# Altium PCB PCB KONACNO.PcbDoc (part 1 of 3)
Units mil, origin at the board's own origin, x right, y up, seen from the top; angles counter-clockwise.
Board outline 9378.94 x 3727.36 mil, 6 copper layers (Top Layer, Signal Layer 1, Signal Layer 2, Signal Layer 3, Signal Layer 4, Bottom Layer), stack 58.8 mil thick; 270 components, 238 nets, 1180 pads, 202 vias.
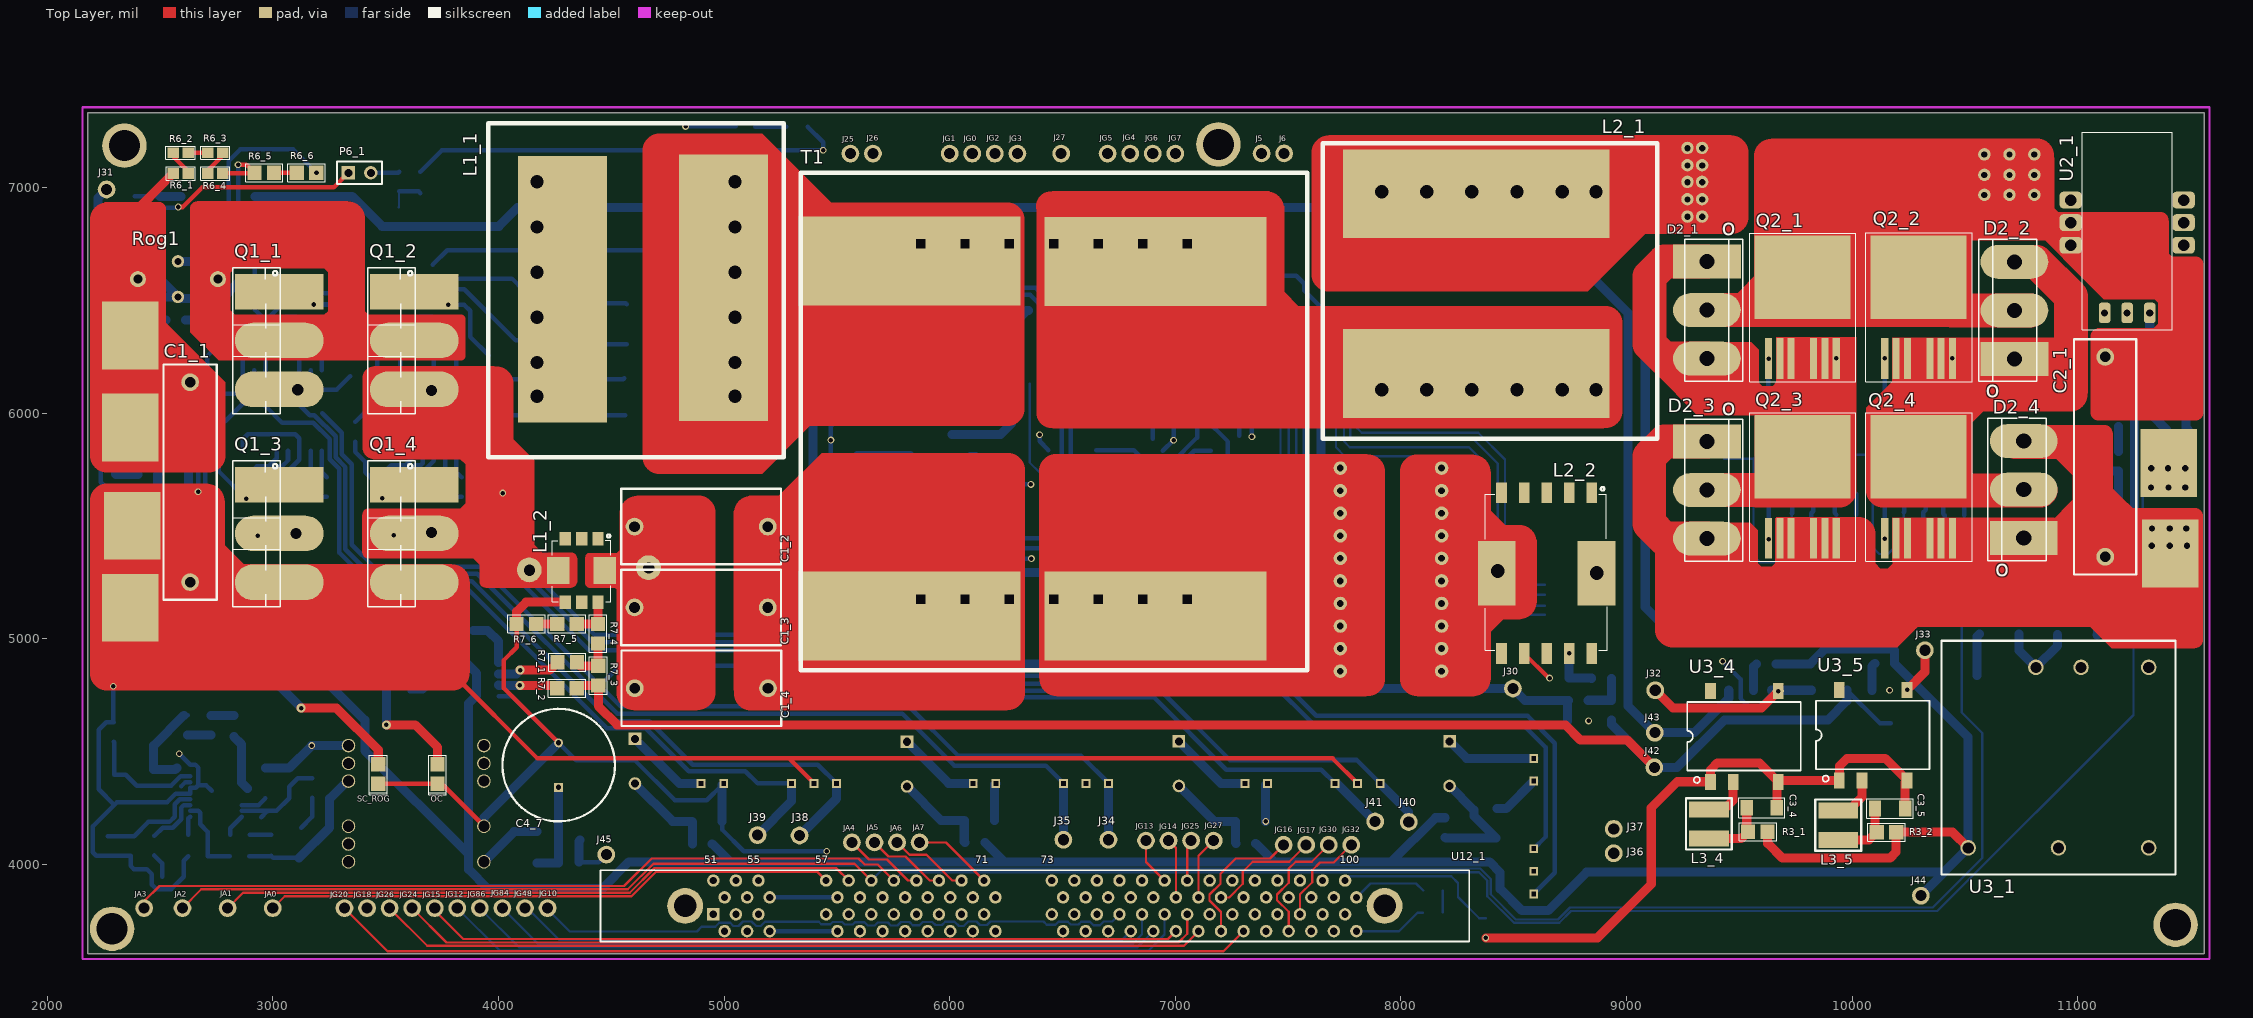
[diagram p0: Top Layer view]
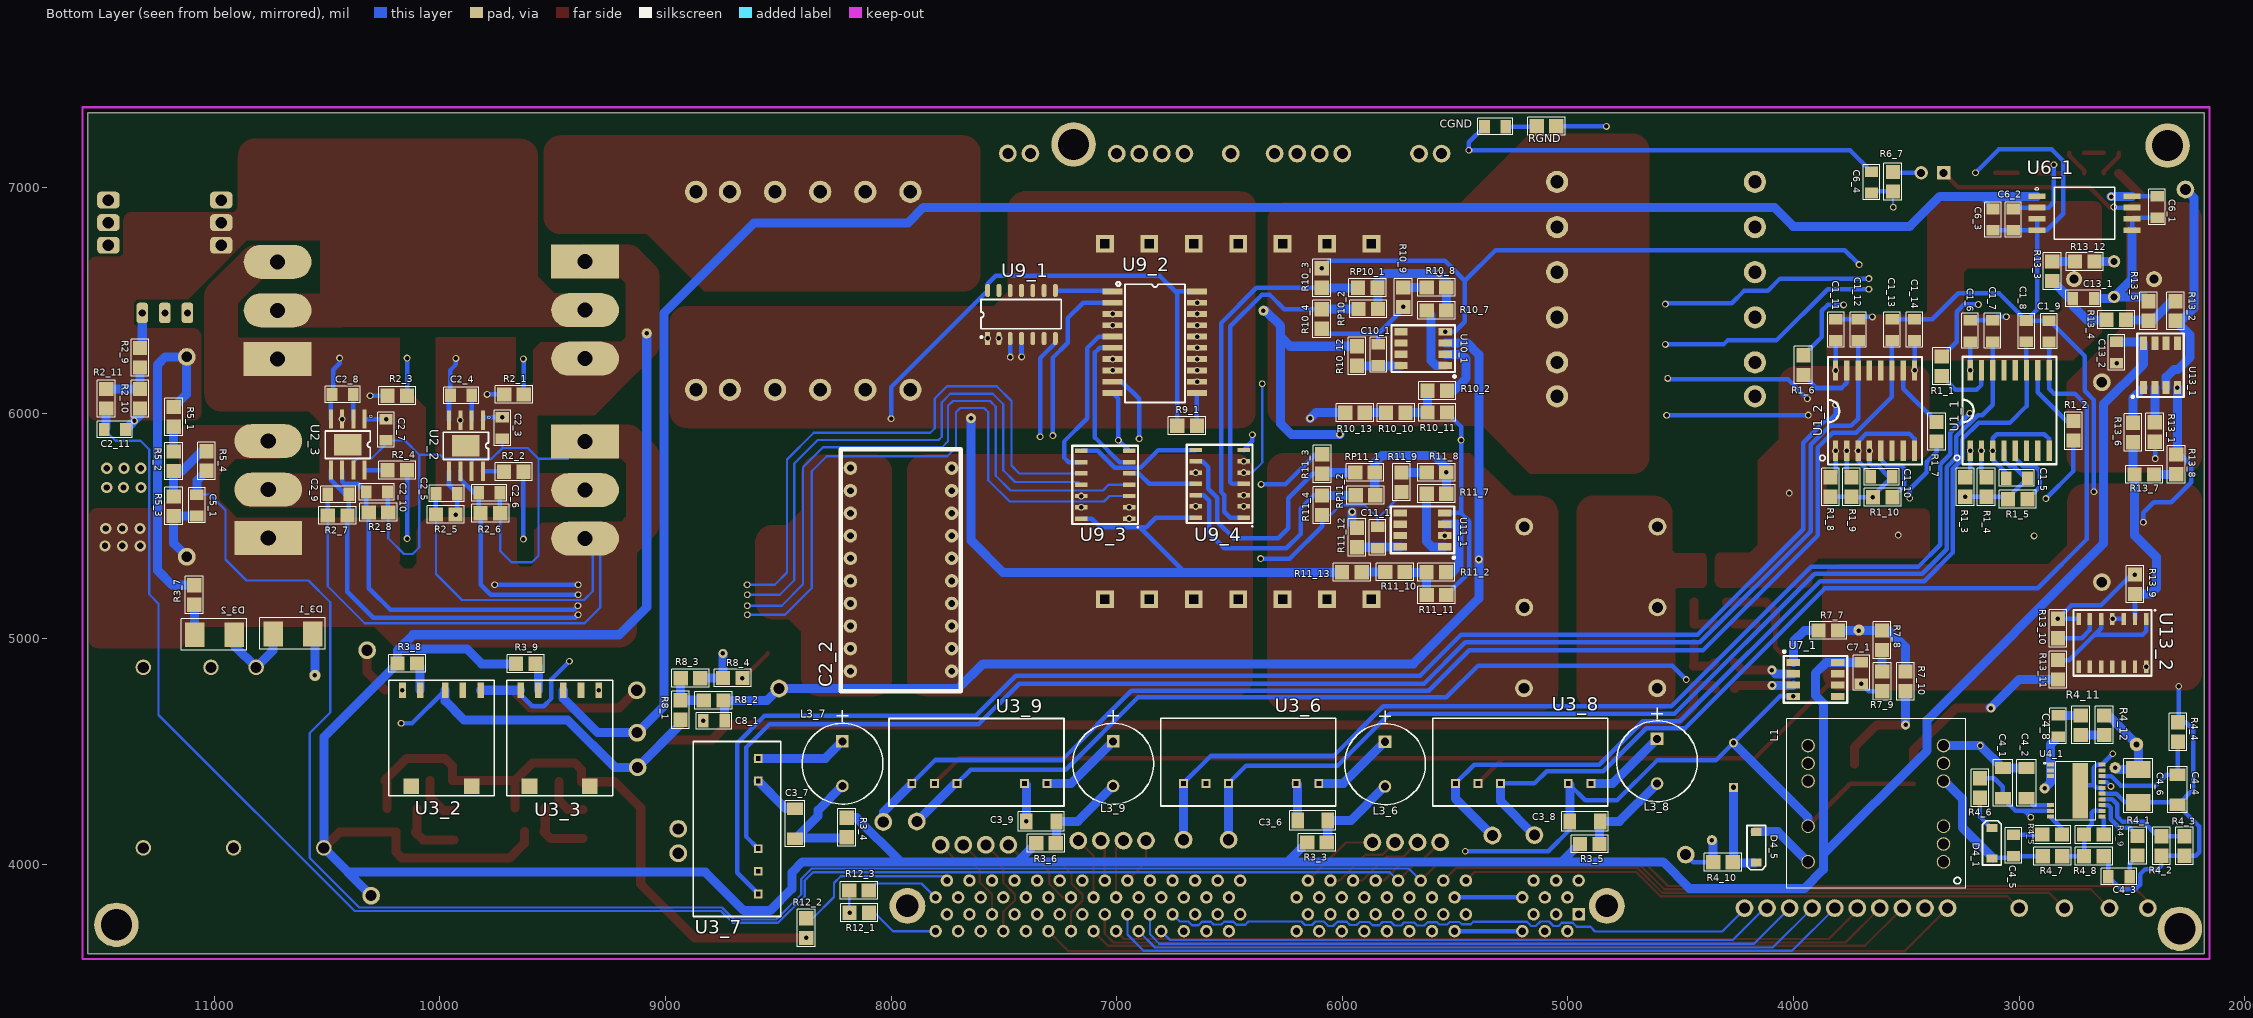
[diagram p1: Bottom Layer view, seen from below]
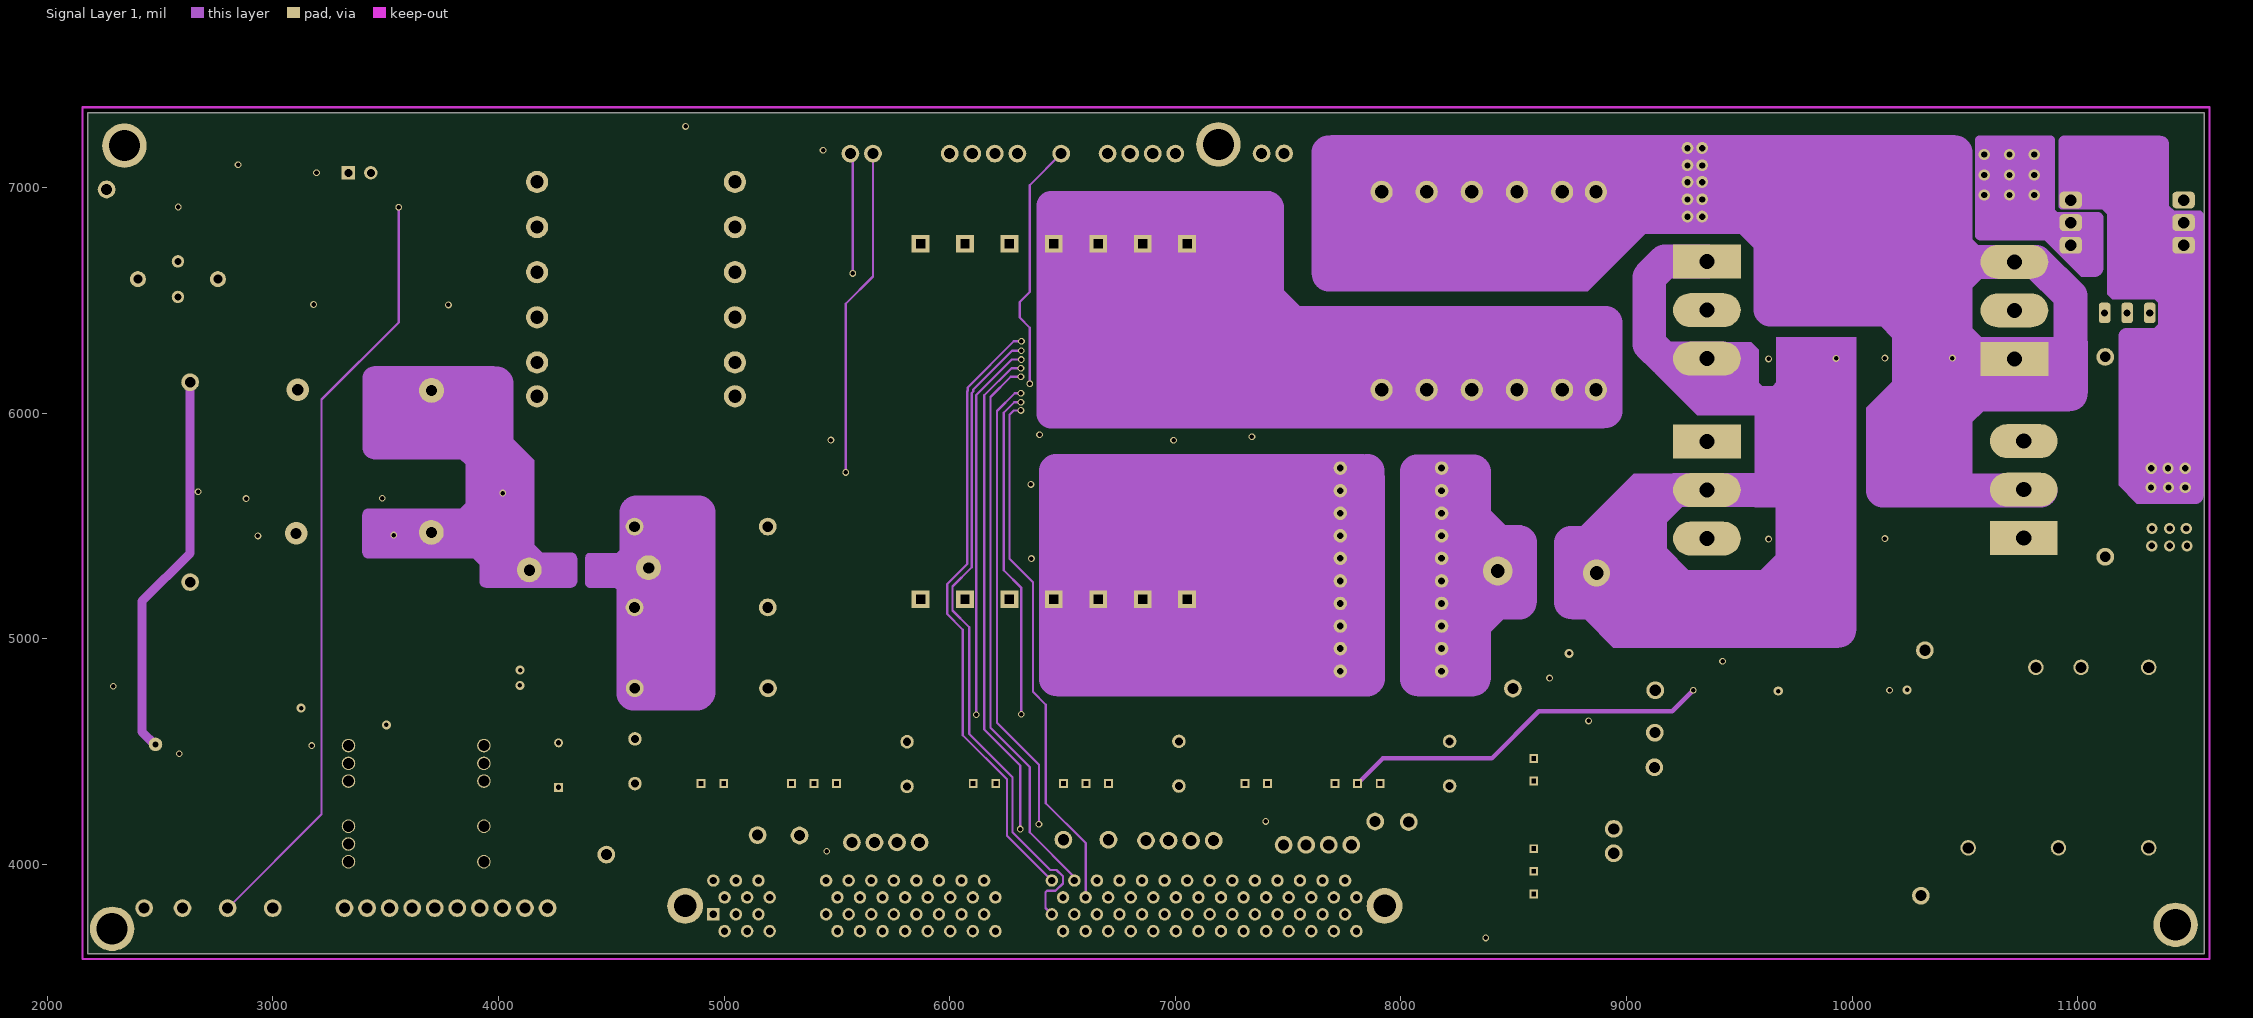
[diagram p2: Signal Layer 1]
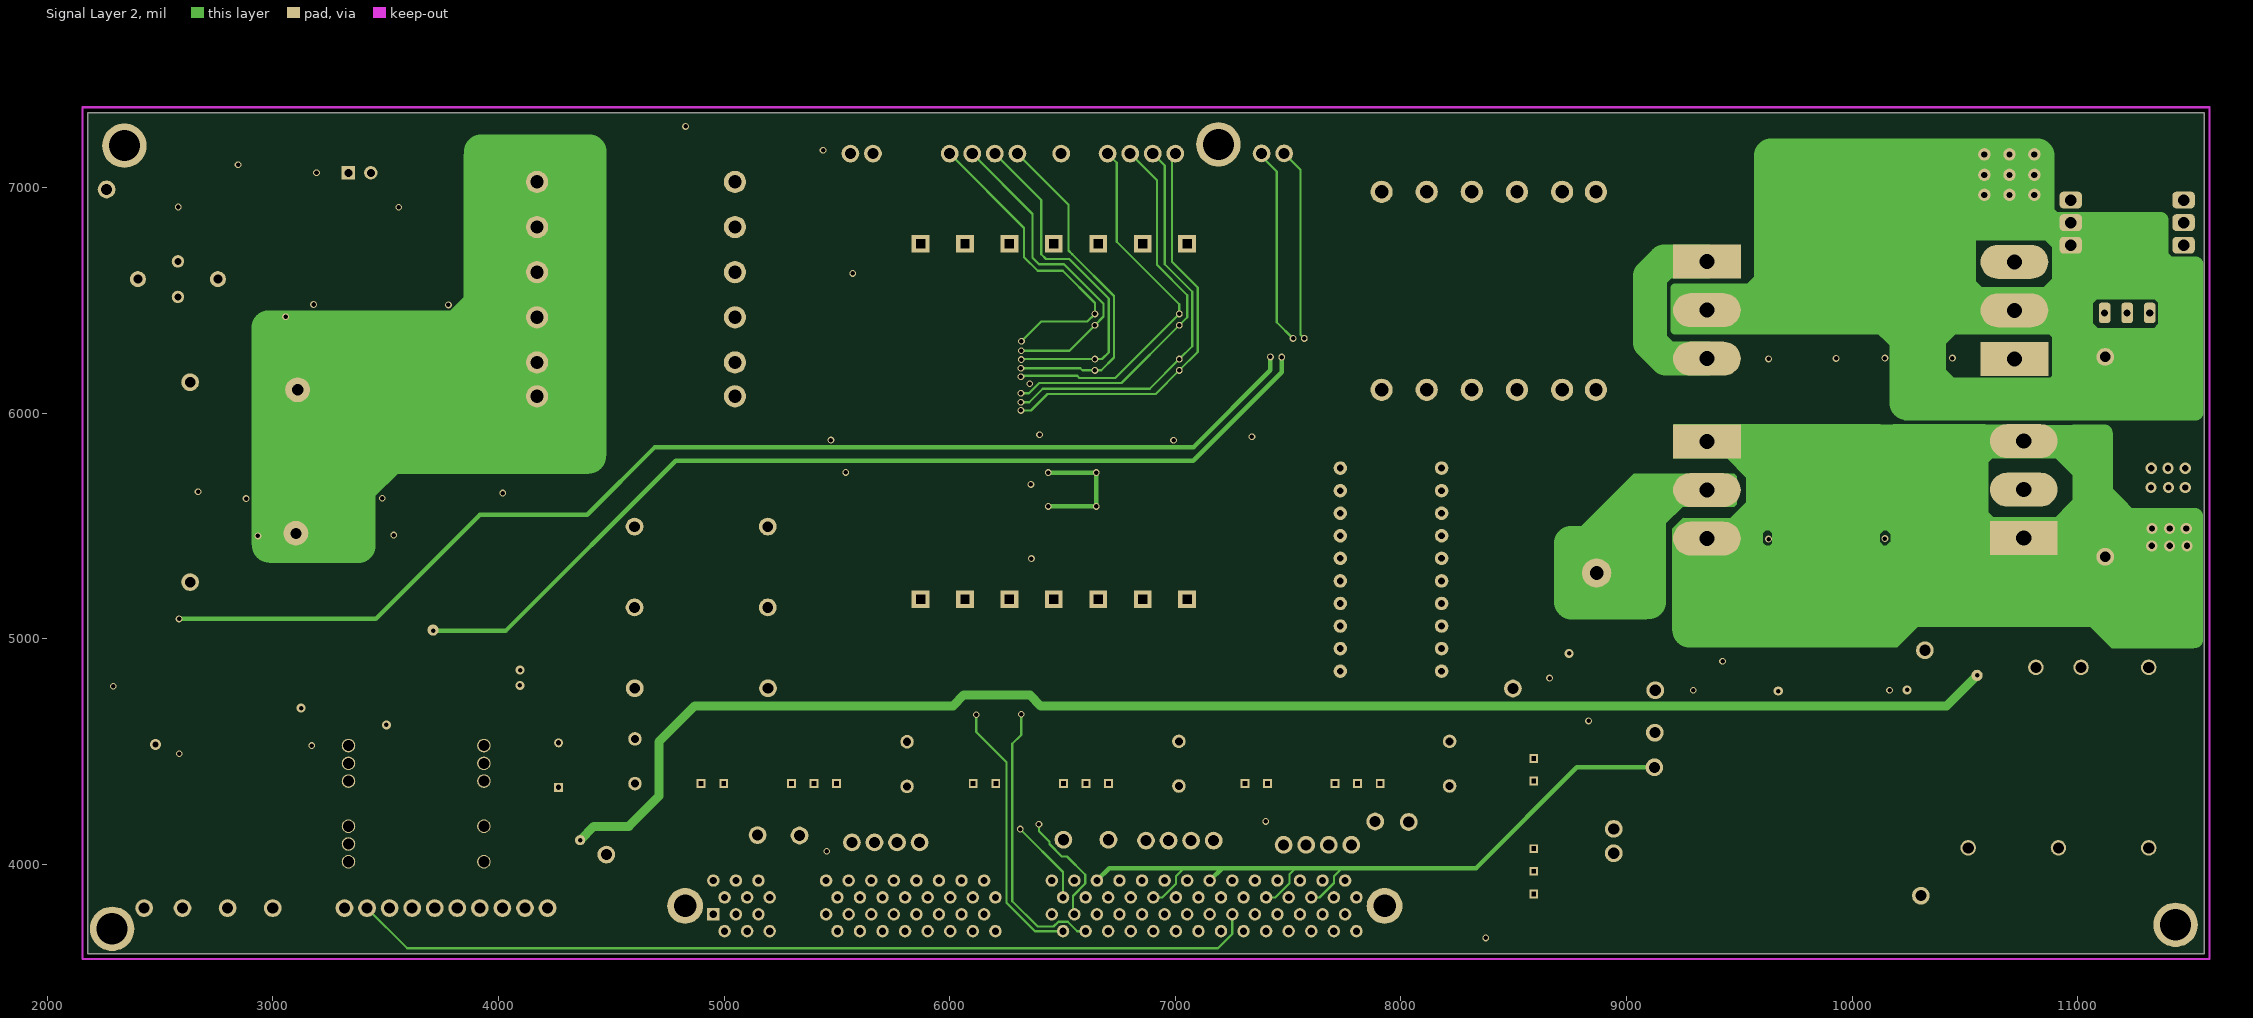
[diagram p3: Signal Layer 2]
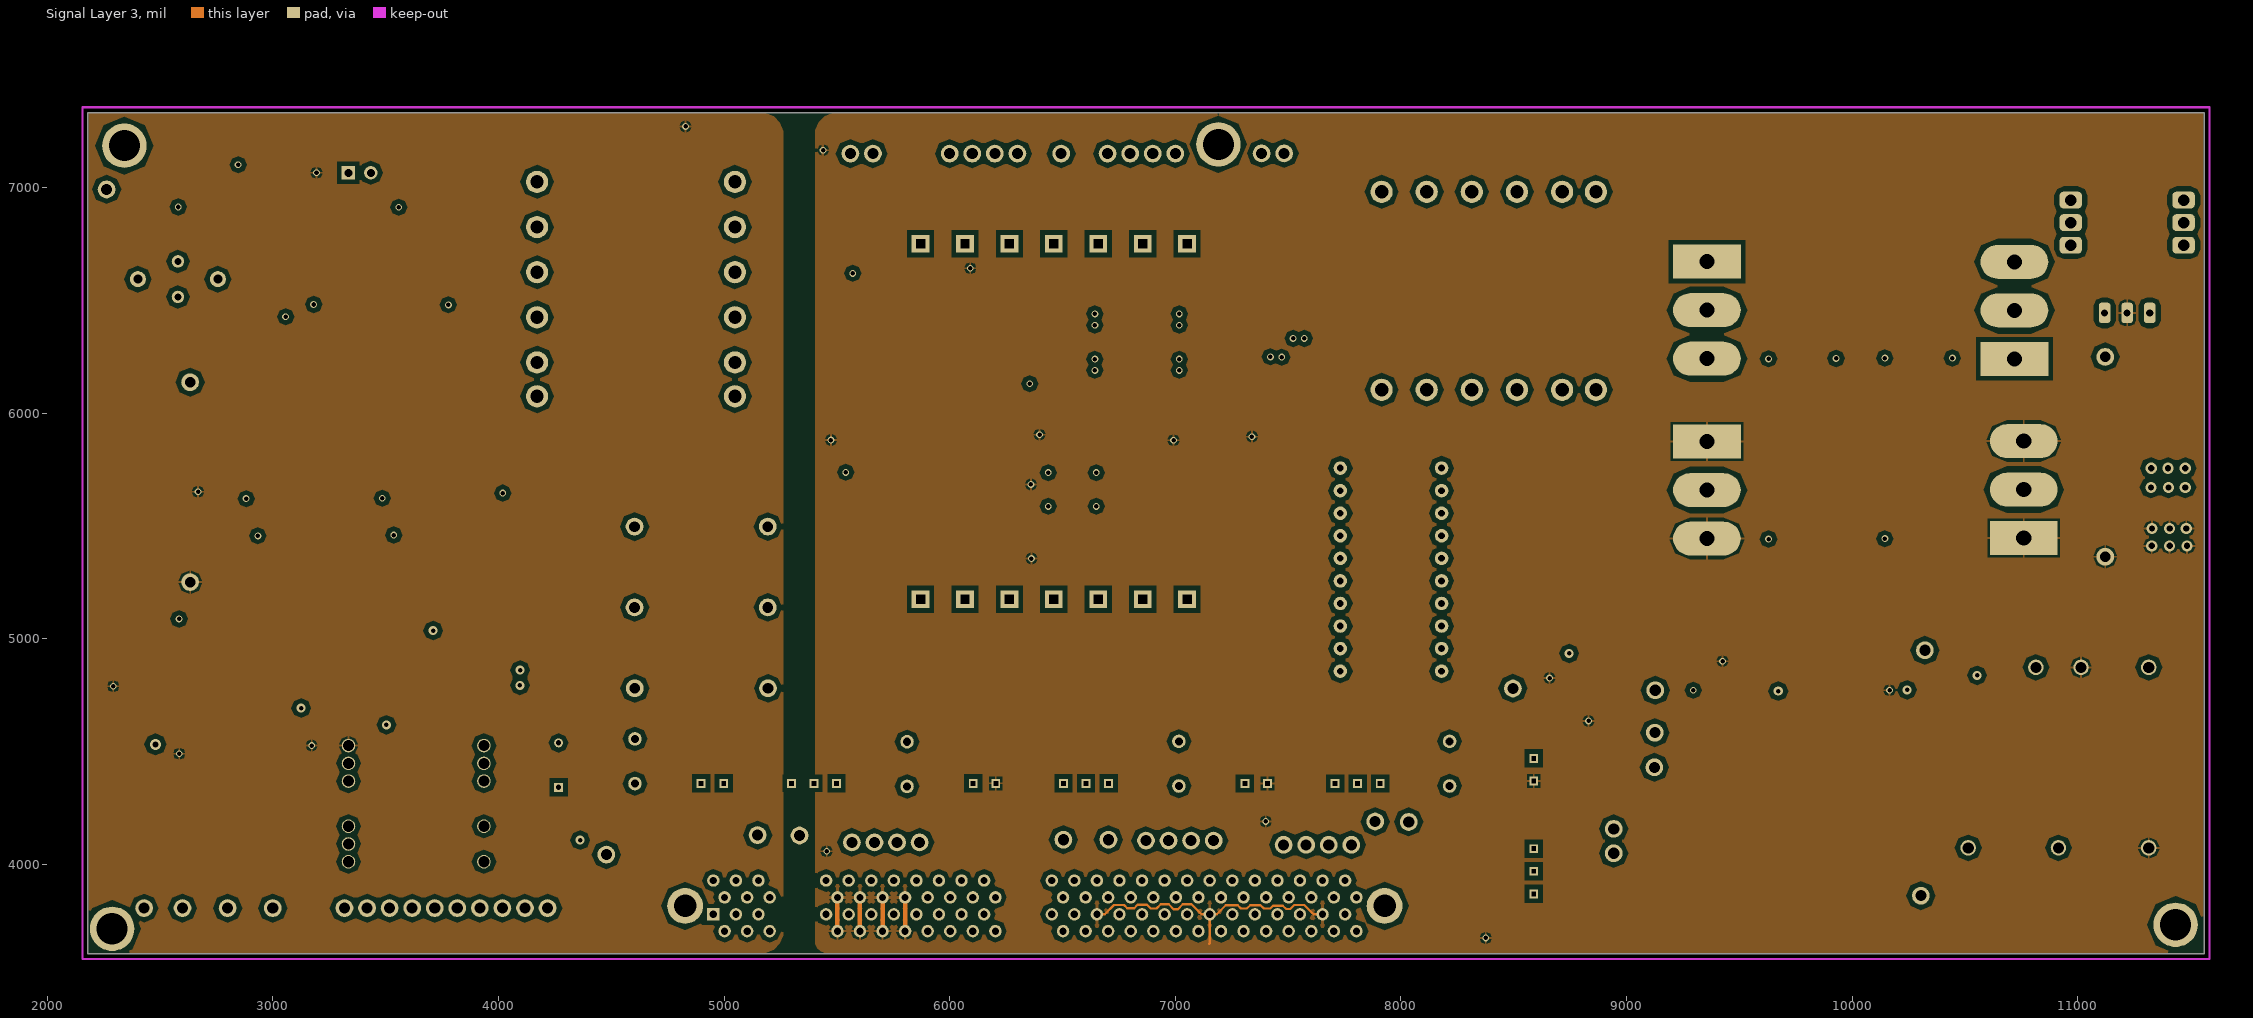
[diagram p4: Signal Layer 3]
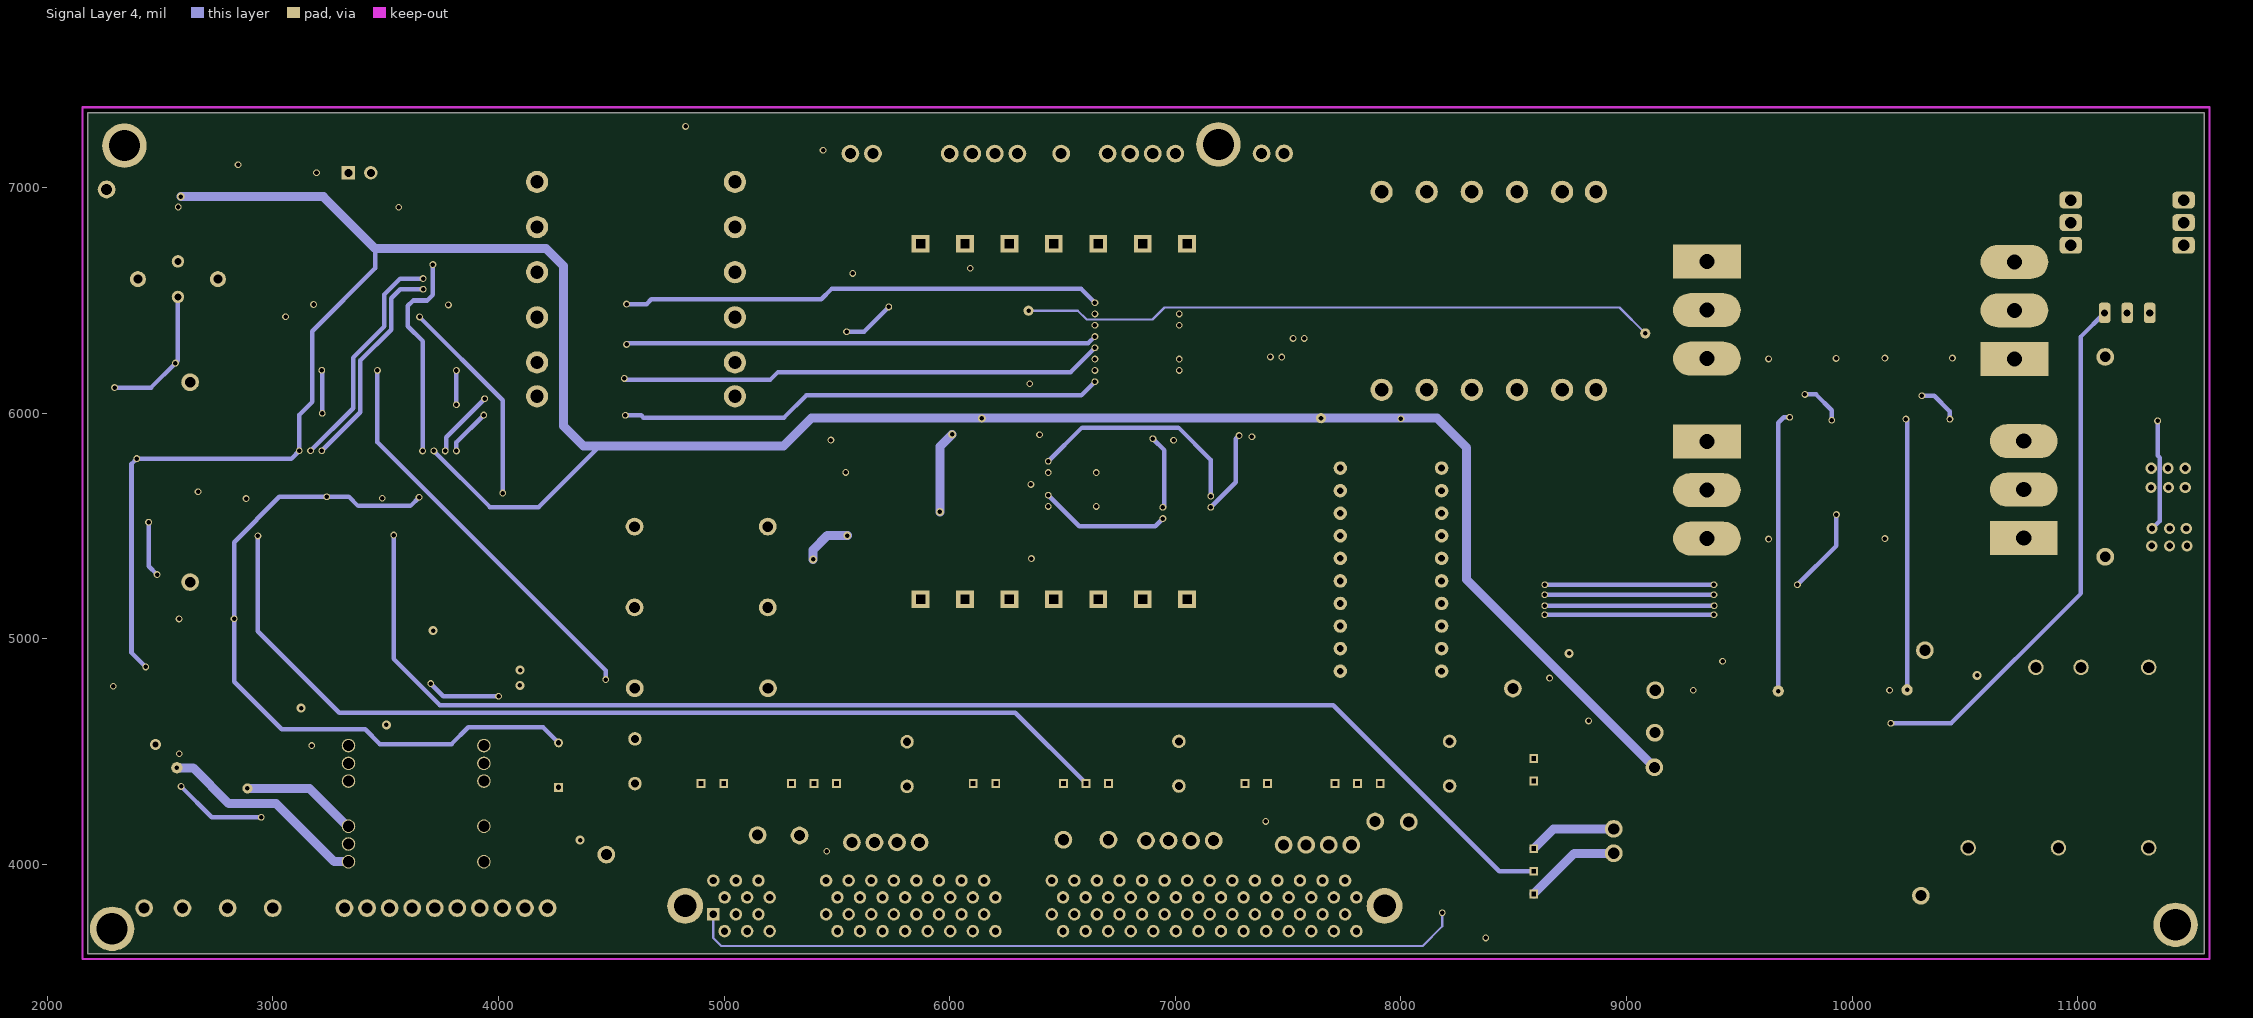
[diagram p5: Signal Layer 4]

## Layer stack, top to bottom
Top Solder: solder mask 0.4, Solder Resist, Dk 3.5
Top Layer: signal copper 1.4
Dielectric 1: core 10, FR-4, Dk 4.2
Signal Layer 1: signal copper 4
Dielectric 3: prepreg 5, Dk 4.2
Signal Layer 2: signal copper 4
Dielectric 4: core 10, Dk 4.2
Signal Layer 3: signal copper 4
Dielectric6: prepreg 5, FR-4, Dk 4.2
Signal Layer 4: signal copper 4
Dielectric 5: core 10, Dk 4.2
Bottom Layer: signal copper 1.4
Bottom Solder: solder mask 0.4, Solder Resist, Dk 3.5

## Board outline
2181.1,3604.33 11560.04,3604.33 11560.04,7331.69 2181.1,7331.69

## Design rules (kind name [scope] priority, off if disabled: settings)
Clearance Clearance_15 [OnLayer('Top Layer') vs OnLayer('Top Layer')] p1: gap=3 except(0: Arc-Text Track-Text SMDPad-Text THPad-Text Via-Text Fill-Text Poly-Text Region-Text Text-Text; 10: Track-THPad Track-Via)
Clearance Clearance_16 [OnLayer('Bottom Layer') vs OnLayer('Bottom Layer')] p2: gap=3 except(0: Arc-Text Track-Text SMDPad-Text THPad-Text Via-Text Fill-Text Poly-Text Region-Text Text-Text; 10: Track-THPad Track-Via)
Clearance Clearance_14 [InNamedPolygon('GNDLV')] p3: gap=20 except(0: Arc-Text Track-Text SMDPad-Text THPad-Text Via-Text Fill-Text Poly-Text Region-Text Text-Text)
Clearance Clearance_13 [InNamedPolygon('GNDHV')] p4: gap=20 except(0: Arc-Text Track-Text SMDPad-Text THPad-Text Via-Text Fill-Text Poly-Text Region-Text Text-Text)
Clearance Clearance_12 [InNamedPolygon('GNDHV')] p5: gap=20 except(0: Arc-Text Track-Text SMDPad-Text THPad-Text Via-Text Fill-Text Poly-Text Region-Text Text-Text)
Clearance Clearance_8 [InNamedPolygon('GNDLV')] p6: gap=20 except(0: Arc-Text Track-Text SMDPad-Text THPad-Text Via-Text Fill-Text Poly-Text Region-Text Text-Text)
Clearance Clearance_7 [InNamedPolygon('GNDLV')] p7: gap=10 except(0: Arc-Text Track-Text SMDPad-Text THPad-Text Via-Text Fill-Text Poly-Text Region-Text Text-Text)
Clearance Clearance_6 [InNamedPolygon('GNDHV')] p8: gap=10 except(0: Arc-Text Track-Text SMDPad-Text THPad-Text Via-Text Fill-Text Poly-Text Region-Text Text-Text)
Clearance Clearance_5 [OnLayer('Signal Layer 1') vs OnLayer('Signal Layer 1')] p9: gap=10 except(0: Arc-Text Track-Text SMDPad-Text THPad-Text Via-Text Fill-Text Poly-Text Region-Text Text-Text)
Clearance Clearance_11 [OnLayer('Signal Layer 4') vs OnLayer('Signal Layer 4')] p10: gap=10 except(0: Arc-Text Track-Text SMDPad-Text THPad-Text Via-Text Fill-Text Poly-Text Region-Text Text-Text)
Clearance Clearance_10 [OnLayer('Signal Layer 3') vs OnLayer('Signal Layer 3')] p11: gap=10 except(0: Arc-Text Track-Text SMDPad-Text THPad-Text Via-Text Fill-Text Poly-Text Region-Text Text-Text)
Clearance Clearance_9 [OnLayer('Signal Layer 2') vs OnLayer('Signal Layer 2')] p12: gap=10 except(0: Arc-Text Track-Text SMDPad-Text THPad-Text Via-Text Fill-Text Poly-Text Region-Text Text-Text)
Clearance Clearance_4 [InNamedPolygon('GNDLV')] p13: gap=20
Clearance Clearance_3 [InNamedPolygon('GNDLV')] p14: gap=20
Clearance Clearance_2 [InNamedPolygon('GND_LV_L04_P008')] p15: gap=20
Clearance Clearance_1 [InNamedPolygon('GNDHV')] p16: gap=20
Clearance [All] p17: gap=0
HoleSize [IsVia] p1: absolutevalues=TRUE maxlimit=196.85 minlimit=20 maxpercent=80.000 minpercent=20.000
HoleToHoleClearance [All] p1: gap=0 allowstackedmicrovias=TRUE
MinimumSolderMaskSliver [All] p1: minsoldermaskwidth=0
PolygonConnect [All] p1: connectstyle=Relief reliefconductorwidth=10 reliefentries=4 polygonreliefangle="90 Angle" airgapwidth=10
RoutingVias [All] p1: holewidth=28 width=50 viastyle="Through Hole" minholewidth=1 minwidth=2 maxholewidth=150 maxwidth=200
SilkToSilkClearance [All] p1: silktosilkclearance=0
SilkToSolderMaskClearance [IsPad] p1: minsilkscreentomaskgap=0 clearancetoexposedcopper=TRUE
SolderMaskExpansion [All] p1: expansion=4
Width [All] p1: maxlimit=200 minlimit=10 preferedwidth=130
25 further rules are at their usual default settings.

## Components (designator, comment, footprint, x,y, rotation, side; value= is the part's Value field where it differs from the comment)
C1_1 "0.47uF" B32673P 2633.86,6136.81 r270 top
C1_2 "3.3nF" B32652 4603.35,5497.05 r0 top
C1_3 "3.3nF" B32652 4603.35,5138.78 r0 top
C1_4 "3.3nF" B32652 4604.33,4780.51 r0 top
C1_5 "3.3nF" C0805 2969.49,5711.61 r0 bottom
C1_6 "1uF" C0805 3217.52,6405.51 r270 bottom
C1_7 "1uF" C0805 3118.11,6322.83 r90 bottom
C1_8 "1uF" C0805 2968.5,6404.53 r270 bottom
C1_9 "1uF" C0805 2868.11,6320.87 r90 bottom
C1_10 "3.3nF" C0805 3568.9,5717.52 r0 bottom
C1_11 "1uF" C0805 3812.99,6410.43 r270 bottom
C1_12 "1uF" C0805 3713.58,6327.76 r90 bottom
C1_13 "1uF" C0805 3562.99,6410.43 r270 bottom
C1_14 "1uF" C0805 3464.57,6327.76 r90 bottom
C2_1 "4.7uF" B32523 11121.06,6249.02 r270 top
C2_2 "10nF" "AVX  1A 105K AN 360" 7731.3,4856.3 r90 bottom
C2_3 "1uF" C0805 9722.44,5892.72 r90 bottom
C2_4 "0.1uF" C0805 9946.85,6078.74 r180 bottom
C2_5 "3.3nF" C0805 10010.83,5642.72 r180 bottom
C2_6 "3.3nF" C0805 9739.17,5646.65 r0 bottom
C2_7 "1uF" C0805 10238.19,5884.84 r90 bottom
C2_8 "0.1uF" C0805 10471.46,6082.68 r180 bottom
C2_9 "3.3nF" C0805 10491.14,5639.76 r180 bottom
C2_10 "3.3nF" C0805 10237.2,5650.59 r0 bottom
C2_11 "0.1uF" C0805 11398.62,5927.17 r0 bottom
C3_4 "2.2uF" C1206 32071.85,-3056.1 r0 top
C3_5 "2.2uF" C1206 32640.16,-3060 r0 top
C3_6 "4.7uF" C1206 -16340.94,-3112.83 r180 bottom
C3_7 "4.7uF" C1206 15732.28,-18292.72 r270 bottom
C3_8 "4.7uF" C1206 -17548.23,-3116.14 r180 bottom
C3_9 "4.7uF" C1206 -15138.74,-3116.5 r180 bottom
C4_1 "10uF" C1206 -4234.25,26832.68 r90 bottom
C4_2 "10uF" C1206 -4339.57,26832.68 r90 bottom
C4_3 "22nF" C0805 2599.41,3945.87 r180 bottom
C4_4 "0.33uF" C1206 9605.31,-18142.13 r270 bottom
C4_5 "47pF" C0805 3025.59,4125 r270 bottom
C4_6 "0.1uF" C1210 2472.44,4274.61 r90 bottom
C4_7 "UPW2A151MHD" UPW2A151MHD 4266.73,4341.54 r90 top
C4_8 "47pF" C0805 2827.76,4571.85 r90 bottom
C5_1 "0.1uF" C0805 11076.77,5550.2 r90 bottom
C6_1 "0.1uF" C0805 2388.78,6872.05 r90 bottom
C6_2 "100pF" C0805 3026.57,6815.94 r90 bottom
C6_3 "0.1uF" C0805 3116.14,6815.94 r90 bottom
C6_4 "0.1uF" C0805 3654.53,7063.98 r270 bottom
C7_1 "0.1uF" C0805 3699.8,4807.09 r90 bottom
C8_1 "1nF" C0805 8743.11,4635.83 r0 bottom
C10_1 "0.1uF" C0805 5840.55,6299.21 r270 bottom
C11_1 "0.1uF" C0805 5843.5,5490.16 r270 bottom
C13_1 "3.3nF" C0805 2756.89,6507.87 r180 bottom
C13_2 "0.1uF" C0805 2568.9,6227.36 r90 bottom
CGND "?" C0805 5364.17,7269.69 r180 bottom
D2_1 "100V" TO-247AC 9356.3,6671.26 r0 top
D2_2 "100V" TO-247AC 10718.5,6240.16 r180 top
D2_3 "100V" TO-247AC 9356.3,5874.02 r0 top
D2_4 "100V" TO-247AC 10759.84,5445.87 r180 top
D4_1 "CMMR1U-04" "SOD-123F Central S" 3121.06,4093.5 r90 bottom
D4_5 "CMMR1U-08" "SOD-123F Central S" 4165.35,4075.79 r270 bottom
J5 "Male single header" Male_single_pin#1 7382.36,7150.98 r0 top
J6 "Male single header" Male_single_pin#1 7482.36,7150.98 r0 top
J25 "Male single header" Male_single_pin#2 5567.91,7150 r0 top
J26 "Male single header" Male_single_pin#3 5665.35,7150 r0 top
J27 "Male single header" Male_single_pin#1 6494.09,7150 r0 top
J30 "Male single header" Male_single_pin#1 8496.06,4779.53 r0 top
J31 "Male single header" Male_single_pin#1 2263.78,6991.14 r0 top
J32 "Male single header" Male_single_pin#1 9126.97,4771.65 r0 top
J33 "Male single header" Male_single_pin#1 10321.85,4948.82 r0 top
J34 "Male single header" Male_single_pin#1 6703.74,4109.25 r0 top
J35 "Male single header" Male_single_pin#1 6503.94,4109.25 r0 top
J36 "Male single header" Male_single_pin#1 8942.91,4049.21 r0 top
J37 "Male single header" Male_single_pin#1 8942.91,4157.48 r0 top
J38 "Male single header" Male_single_pin#1 5334.65,4127.95 r0 top
J39 "Male single header" Male_single_pin#1 5148.62,4129.92 r0 top
J40 "Male single header" Male_single_pin#1 8034.45,4187.99 r0 top
J41 "Male single header" Male_single_pin#1 7885.83,4189.96 r0 top
J42 "Male single header" Male_single_pin#1 9123.03,4430.12 r0 top
J43 "Male single header" Male_single_pin#1 9125,4583.66 r0 top
J44 "Male single header" Male_single_pin#1 10304.13,3861.22 r0 top
J45 "Male single header" Male_single_pin#1 4478.35,4043.31 r0 top
JA0 "Male single header" Male_single_pin#4 2689.96,3806.1 r0 top
JA1 "Male single header" Male_single_pin#5 2858.27,3806.1 r0 top
JA2 "Male single header" Male_single_pin#6 3181.1,3806.1 r0 top
JA3 "Male single header" Male_single_pin#7 2400,3806.1 r0 top
JA4 "Male single header" Male_single_pin#8 5561.02,4097.44 r180 top
JA5 "Male single header" Male_single_pin#9 5673.23,4097.44 r180 top
JA6 "Male single header" Male_single_pin#10 5774.61,4097.44 r180 top
JA7 "Male single header" Male_single_pin#11 5868.11,4097.44 r180 top
JG0 "Male single header" Male_single_pin#12 6117.13,7150.59 r0 top
JG1 "Male single header" Male_single_pin#13 6048.23,7149.61 r0 top
JG2 "Male single header" Male_single_pin#14 6576.77,7588.58 r0 top
JG3 "Male single header" Male_single_pin#15 6976.77,7939.21 r0 top
JG4 "Male single header" Male_single_pin#16 6965.55,7398.62 r0 top
JG5 "Male single header" Male_single_pin#17 6767.72,7298.23 r0 top
JG6 "Male single header" Male_single_pin#18 6520.67,7156.5 r0 top
JG7 "Male single header" Male_single_pin#19 6435.04,7361.22 r0 top
JG10 "Male single header" Male_single_pin#20 4227.36,3787.4 r90 top
JG12 "Male single header" Male_single_pin#21 3745.08,3806.1 r90 top
JG13 "Male single header" Male_single_pin#1 6870,4105.31 r90 top
JG14 "Male single header" Male_single_pin#1 6970,4105.31 r90 top
JG15 "Male single header" Male_single_pin#22 3602.36,3806.1 r90 top
JG16 "Male single header" Male_single_pin#23 7482.28,4086.61 r90 top
JG17 "Male single header" Male_single_pin#24 7587.6,4086.61 r90 top
JG18 "Male single header" Male_single_pin#25 3367.13,3806.1 r90 top
JG20 "Male single header" Male_single_pin#26 3250,3806.1 r90 top
JG24 "Male single header" Male_single_pin#27 3457.68,3806.1 r90 top
JG25 "Male single header" Male_single_pin#28 7067.91,4105.31 r90 top
JG26 "Male single header" Male_single_pin#29 3468.5,3806.1 r90 top
JG27 "Male single header" Male_single_pin#30 7170.28,4105.31 r90 top
JG30 "Male single header" Male_single_pin#31 7687.01,4086.61 r90 top
JG32 "Male single header" Male_single_pin#32 7788.39,4086.61 r90 top
JG48 "Male single header" Male_single_pin#33 4121.06,3806.1 r90 top
JG84 "Male single header" Male_single_pin#34 3988.19,3806.1 r90 top
JG86 "Male single header" Male_single_pin#35 3875.98,3806.1 r90 top
L1 "PS15-195" PS15-195 3335.63,4011.61 r90 bottom
L1_1 "35uH" PCB3515M1 4170.28,6073.62 r90 top
L1_2 "P8202NLT" P8202NLT 4441.93,5441.93 r270 top
L2_1 "0.35uH" PCB3515M1 8865.16,6102.36 r180 top
L2_2 "PB0026NLT" PB0026NLT 8845.47,5646.65 r270 top
L3_4 "10uH" SDE0403A-100M 9364.17,4244.09 r270 top
L3_5 "10uH" SDE0403A-100M 9937.99,4238.19 r270 top
L3_6 "22uH" Ind_RLB0914-470KL 5810.04,4345.47 r270 bottom
L3_7 "22uH" Ind_RLB0914-470KL 8214.57,4347.44 r270 bottom
L3_8 "22uH" Ind_RLB0914-470KL 4604.33,4358.27 r270 bottom
L3_9 "22uH" Ind_RLB0914-470KL 7014.76,4347.44 r270 bottom
OC "0805SR-T1" 0805 3741.14,4368.11 r90 top
P6_1 "Header 2" HDR1X2 3334.65,7064.96 r0 top
Q1_1 "SCT3030AL SMD" "TO-247AD-V SMD" 2930.12,6538.39 r270 top
Q1_2 "SCT3030AL SMD" "TO-247AD-V SMD" 3528.54,6538.39 r270 top
Q1_3 "SCT3030AL SMD" "TO-247AD-V SMD" 2930.12,5683.07 r270 top
Q1_4 "SCT3030AL SMD" "TO-247AD-V SMD" 3528.54,5683.07 r270 top
Q2_1 "100V" "D2-PAK 7 PIN" 9779.09,6659.33 r0 top
Q2_2 "100V" "D2-PAK 7 PIN" 10294.09,6659.45 r0 top
Q2_3 "100V" "D2-PAK 7 PIN" 9779.09,5862.95 r0 top
Q2_4 "100V" "D2-PAK 7 PIN" 10294.09,5862.95 r0 top
R1_1 "10" R0805 3343.5,6164.37 r90 bottom
R1_2 "100" R0805 2759.84,5964.57 r270 bottom
R1_3 "100" R0805 3239.17,5628.94 r90 bottom
R1_4 "100" R0805 3145.67,5628.94 r90 bottom
R1_5 "11k" R0805 3050.2,5618.11 r180 bottom
R1_6 "10" R0805 3956.69,6169.29 r90 bottom
R1_7 "100" R0805 3366.14,5960.63 r270 bottom
R1_8 "100" R0805 3836.61,5628.94 r90 bottom
R1_9 "100" R0805 3743.11,5628.94 r90 bottom
R1_10 "11k" R0805 3648.62,5626.97 r180 bottom
R2_1 "10" R0805 9714.57,6082.68 r180 bottom
R2_2 "10" R0805 9715.55,5740.16 r180 bottom
R2_3 "10" R0805 10231.3,6076.77 r180 bottom
R2_4 "10" R0805 10231.3,5747.05 r180 bottom
R2_5 "100" R0805 10016.73,5550.2 r180 bottom
R2_6 "100" R0805 9732.28,5556.1 r0 bottom
R2_7 "100" R0805 10496.06,5546.26 r180 bottom
R2_8 "100" R0805 10228.35,5560.04 r0 bottom
R2_9 "510" R0805 11328.74,6201.77 r90 bottom
R2_10 "1.2k" R0805 11328.74,6020.67 r90 bottom
R2_11 "100" R0805 11478.35,6107.28 r270 bottom
R3_1 "0" R0805 9538.39,4144.69 r0 top
R3_2 "0" R0805 10108.27,4142.72 r0 top
R3_3 "0" R0805 6068.9,4097.44 r0 bottom
R3_4 "0" R0805 8195.87,4120.08 r90 bottom
R3_5 "0" R0805 4860.24,4090.55 r0 bottom
R3_6 "0" R0805 7269.69,4093.5 r0 bottom
R3_7 "0" R0805 11087.6,5150.59 r90 bottom
R3_8 "0" R0805 10187.01,4890.75 r180 bottom
R3_9 "0" R0805 9575.79,4888.78 r0 bottom
R4_1 "110k" R0805 2475.39,4039.37 r90 bottom
R4_2 "120k" R0805 2370.08,4038.39 r90 bottom
R4_3 "120k" R0805 2267.72,4038.39 r90 bottom
R4_4 "0.267" R0805 2296.26,4629.92 r270 bottom
R4_5 "20k" R0805 2811.02,4131.89 r0 bottom
R4_6 "200" R0805 3174.21,4381.89 r270 bottom
R4_7 "160k" R0805 2809.05,4036.42 r0 bottom
R4_8 "5.1k" R0805 2625.98,4036.42 r0 bottom
R4_9 "191K" R0805 2625.98,4131.89 r0 bottom
R4_10 "0" R0805 4269.69,4009.84 r0 bottom
R4_11 "0" R0805 2727.36,4660.43 r270 bottom
R4_12 "0" R0805 2623.03,4573.82 r90 bottom
R5_1 "10k" R0805 11179.13,5939.96 r90 bottom
R5_2 "10k" R0805 11179.13,5743.11 r90 bottom
R5_3 "1.2k" R0805 11179.13,5544.29 r90 bottom
R5_4 "100" R0805 11033.46,5830.71 r270 bottom
R6_1 "150k" R0603 2625.98,7062.01 r180 top
R6_2 "150k" R0603 2625,7153.54 r180 top
R6_3 "150k" R0603 2778.54,7153.54 r180 top
R6_4 "150k" R0603 2778.54,7062.01 r180 top
R6_5 "1k2" R0805 3005.91,7064.96 r180 top
R6_6 "1k2" R0805 3192.91,7064.96 r180 top
R6_7 "100" R0805 3560.04,7068.9 r270 bottom
R7_1 "330" R0805 4261.81,4895.67 r0 top
R7_2 "330" R0805 4260.83,4780.51 r0 top
R7_3 "10k" R0805 4442.91,4879.92 r270 top
R7_4 "10k" R0805 4441.93,4979.33 r90 top
R7_5 "10" R0805 4260.83,5065.94 r0 top
R7_6 "10" R0805 4080.71,5065.94 r0 top
R7_7 "20k" R0805 3803.15,5036.42 r0 bottom
R7_8 "11k" R0805 3608.27,4949.8 r90 bottom
R7_9 "2.2k" R0805 3607.28,4767.72 r90 bottom
R7_10 "330" R0805 3503.94,4854.33 r270 bottom
R8_1 "10k" R0805 8933.07,4727.36 r270 bottom
R8_2 "330" R0805 8829.72,4726.38 r180 bottom
R8_3 "10k" R0805 8932.09,4824.8 r180 bottom
R8_4 "10" R0805 8658.46,4825.79 r0 bottom
R9_1 "2.2k" R0805 6731.3,5943.9 r180 bottom
R10_2 "330" R0805 5536.42,6099.41 r0 bottom
R10_3 "330" R0805 6091.54,6641.73 r270 bottom
R10_4 "330" R0805 6091.54,6374.02 r90 bottom
R10_7 "20k" R0805 5539.37,6454.72 r0 bottom
R10_8 "11k" R0805 5625.98,6557.09 r180 bottom
R10_9 "2.2k" R0805 5730.31,6470.47 r90 bottom
R10_10 "11k" R0805 5719.49,6001.97 r0 bottom
R10_11 "16.2k" R0805 5536.42,6002.95 r0 bottom
R10_12 "0" R0805 5935.04,6209.65 r90 bottom
R10_13 "0" R0805 5987.2,6001.97 r180 bottom
R11_2 "330" R0805 5540.35,5294.29 r0 bottom
R11_3 "330" R0805 6088.58,5817.91 r270 bottom
R11_4 "330" R0805 6089.57,5548.23 r90 bottom
R11_7 "20k" R0805 5539.37,5642.72 r0 bottom
R11_8 "11k" R0805 5625.98,5737.2 r180 bottom
R11_9 "2.2k" R0805 5738.19,5650.59 r90 bottom
R11_10 "16.2k" R0805 5723.43,5295.28 r0 bottom
R11_11 "11k" R0805 5539.37,5193.9 r0 bottom
R11_12 "0" R0805 5935.04,5405.51 r90 bottom
R11_13 "0" R0805 6000.98,5294.29 r180 bottom
R12_1 "4.7k" R0805 8184.06,3785.43 r180 bottom
R12_2 "2.2k" R0805 8375.98,3674.21 r90 bottom
R12_3 "4.7k" R0805 8185.04,3883.86 r180 bottom
R13_1 "330" R0805 2399.61,5959.65 r270 bottom
R13_2 "330" R0805 2307.09,6496.06 r270 bottom
R13_3 "100" R0805 2853.35,6672.24 r270 bottom
R13_4 "11k" R0805 2526.57,6413.39 r0 bottom
R13_5 "11k" R0805 2427.17,6496.06 r270 bottom
R13_6 "20k" R0805 2496.06,5871.06 r90 bottom
R13_7 "11k" R0805 2402.56,5727.36 r0 bottom
R13_8 "2.2k" R0805 2304.13,5815.94 r270 bottom
R13_9 "11k" R0805 2487.2,5284.45 r270 bottom
R13_10 "11k" R0805 2828.74,5088.58 r270 bottom
R13_11 "330" R0805 2827.76,4905.51 r270 bottom
R13_12 "0" R0805 2666.34,6671.26 r0 bottom
RGND "?" R0805 5138.78,7271.65 r180 bottom
Rog1 "RogovskiVN" RogovskiVNpravi 2402.56,6593.5 r0 top
RP10_1 "0" R0805 5844.49,6555.12 r0 bottom
RP10_2 "0" R0805 5841.54,6461.61 r0 bottom
RP11_1 "0" R0805 5856.3,5736.22 r0 bottom
RP11_2 "0" R0805 5854.33,5635.83 r0 bottom
SC_ROG "0805SR-T1" 0805 3478.35,4368.11 r90 top
T1 "PCB5528WC" PCB5528WC 5871.06,6750 r0 top
U1_1 "UCC21521" "SOIC RW-16" 3217.8,5833.15 r90 bottom
U1_2 "UCC21521" "SOIC RW-16" 3814.25,5832.36 r90 bottom
U2_1 "LTS 25-NP" "LEM LTS 25-NP" 10968.5,6744.09 r180 top
U2_2 "UCC27211" UCC27211AQDDARQ1 9809.06,5968.5 r270 bottom
U2_3 "UCC27211" UCC27211AQDDARQ1 10332.83,5973.35 r270 bottom
U3_1 "THL 10-4812WI" "THL 10WI" 10813.98,4873.03 r270 top
U3_2 "TRN 3-1211SM" "TRN 3SM" 10165.35,4771.65 r180 bottom
U3_3 "TRN 3-1211SM" "TRN 3SM" 9641.73,4771.65 r180 bottom
U3_4 "R2S-1215" R2S-1215 9372.05,4366.14 r90 top
U3_5 "R2S-1215" R2S-1215 9942.91,4372.05 r90 top
U3_6 "R12P22005D" R12P22005D 6104.33,4359.25 r0 bottom
U3_7 "R12P22005D" R12P22005D 8588.58,4469.49 r270 bottom
U3_8 "R12P22005D" R12P22005D 4898.62,4359.25 r0 bottom
U3_9 "R12P22005D" R12P22005D 7308.07,4358.27 r0 bottom
U4_1 "LT8315" LT8315 2740.16,4326.77 r180 bottom
U6_1 "ACPL-C87B-000E" ACPL-C87B-000E 2710.63,6885.83 r180 bottom
U7_1 "LM293D" SO8 4000.98,4894.69 r180 bottom
U9_1 "TI CD74HC30M96" CD74 7571.85,6330.71 r90 bottom
U9_2 "74LCX373SJX" 74LCX 7017.72,6539.37 r180 bottom
U9_3 "HEF4070BT" SO14 6944.88,5532.48 r0 bottom
U9_4 "74HCT08D SMD" SO14 6437.01,5536.42 r0 bottom
U10_1 "LM293D" SO8 5543.31,6210.63 r0 bottom
U11_1 "LM293D" SO8 5546.26,5407.48 r0 bottom
U12_1 "DSP 28335" "DSP 28335" 4830.71,3814.96 r0 top
U13_1 "LM293D" SO8 2448.82,6113.19 r90 bottom
U13_2 "74HC02D SMD" SO14 2437.01,5087.6 r270 bottom

## Footprints (in the part's own frame and the unit in brackets; to place one, negate y for a bottom-side part, rotate by r counter-clockwise, add the part's x,y. Pads: shape width x height; smd on the part's side, far side on the other; paste and mask are expansions set on the pad)
74LCX [mm]
  rect 2.25x0.65 smd: 1(0,0) 2(0,-1.27) 3(0,-2.54) 4(0,-3.81) 5(0,-5.08) 6(0,-6.35) 7(0,-7.62) 8(0,-8.89) 9(0,-10.16) 10(0,-11.43) 11(9.5,-11.43) 12(9.5,-10.16) 13(9.5,-8.89) 14(9.5,-7.62) 15(9.5,-6.35) 16(9.5,-5.08) 17(9.5,-3.81) 18(9.5,-2.54) 19(9.5,-1.27) 20(9.5,0)
  silkscreen extent 0.41,-12.51 8.14,1.06
0805 [mm]
  rect 1.6x1.6 smd: 1(-0.275,0.275) 2(1.925,0.275)
  silkscreen extent -1.5,-0.72 2.93,1.28
ACPL-C87B-000E [mm]
  rect 1.905x0.64 smd: 1(-5.35,1.905) 2(-5.35,0.635) 3(-5.35,-0.635) 4(-5.35,-1.905) 5(5.35,-1.905) 6(5.35,-0.635) 7(5.35,0.635) 8(5.35,1.905)
  silkscreen extent -5.54,-2.93 3.4,2.93
"AVX  1A 105K AN 360" [mil]
  round 60 hole 29.84: 1(0,0) 1(100,0) 1(200,0) 1(300,0) 1(400,0) 1(500,0) 1(600,0) 1(700,0) 1(800,0) 1(900,0) 2(0,448.82) 2(100,448.82) 2(200,448.82) 2(300,448.82) 2(400,448.82) 2(500,448.82) 2(600,448.82) 2(700,448.82) 2(800,448.82) 2(900,448.82)
  silkscreen extent -89,-39 984,492
B32523 [mm]
  round 2 hole 1.2: 1(0,0) 2(22.5,0)
  silkscreen extent -2,-3.5 24.5,3.5
B32652 [mm]
  round 2 hole 1.2: 1(0,0) 2(15,0)
  silkscreen extent -1.5,-4.25 16.5,4.25
B32673P [mm]
  round 2 hole 1.2: 1(0,0) 2(22.5,0)
  silkscreen extent -2,-3 24.5,3
C0805 [mm]
  rect 1.2x1.5 smd: 1(-0.15,0) 2(2.25,0)
  silkscreen extent -0.92,-0.92 3.03,0.92
C1206 [mm]
  rect 1.4x1.8 smd: 1(-572.5,185.6) 2(-569.1,185.6)
  silkscreen extent -573.4,184.5 -568.2,186.7
C1210 [mm]
  rect 1.9x2.8 smd: 1(0,0) 2(3.7,0)
  silkscreen extent -1.17,-1.63 4.9,1.65
CD74 [mm]
  rect 1.5x0.55 smd: 1(0,0)
  oval 1.5x0.55 smd: 2(0,-1.27) 3(0,-2.54) 4(0,-3.81) 5(0,-5.08) 6(0,-6.35) 7(0,-7.62) 8(5.4,-7.62) 9(5.4,-6.35) 10(5.4,-5.08) 11(5.4,-3.81) 12(5.4,-2.54) 13(5.4,-1.27) 14(5.4,0)
  silkscreen extent 0.06,-8.28 4.4,0.8
"D2-PAK 7 PIN" [mm]
  rect 0.8x4.6 smd: 1(-3.81,-10.6) 2(-2.54,-10.6) 3(-1.27,-10.6) 5(1.27,-10.6) 6(2.54,-10.6) 7(3.81,-10.6)
  rect 10.8x9.4 smd: 8(0,-1.45)
  silkscreen extent -5.92,-13.2 6.02,3.52
"DSP 28335" [mm]
  rect 1.4x1.4 hole 0.81: 1(3.094,-0.918)
  round 1.4 hole 0.81: 2(4.364,-2.818) 3(5.634,-0.918) 4(6.904,-2.818) 5(8.174,-0.918) 6(9.444,-2.818) 7(15.794,-0.918) 8(17.064,-2.818) 9(18.334,-0.918) 10(19.604,-2.818) 11(20.874,-0.918) 12(22.144,-2.818) 13(23.414,-0.918) 14(24.684,-2.818) 15(25.954,-0.918) 16(27.224,-2.818) 17(28.494,-0.918) 18(29.764,-2.818) 19(31.034,-0.918) 20(32.304,-2.818) 21(33.574,-0.918) 22(34.844,-2.818) 23(41.194,-0.918) 24(42.464,-2.818) 25(43.734,-0.918) 26(45.004,-2.818) 27(46.274,-0.918) 28(47.544,-2.818) 29(48.814,-0.918) 30(50.084,-2.818) 31(51.354,-0.918) 32(52.624,-2.818) 33(53.894,-0.918) 34(55.164,-2.818) 35(56.434,-0.918) 36(57.704,-2.818) 37(58.974,-0.918) 38(60.244,-2.818) 39(61.514,-0.918) 40(62.784,-2.818) 41(64.054,-0.918) 42(65.324,-2.818) 43(66.594,-0.918) 44(67.864,-2.818) 45(69.134,-0.918) 46(70.404,-2.818) 47(71.674,-0.918) 48(72.944,-2.818) 49(74.214,-0.918) 50(75.484,-2.818) 51(3.094,2.882) 52(4.364,0.982) 53(5.634,2.882) 54(6.904,0.982) 55(8.174,2.882) 56(9.444,0.982) 57(15.794,2.882) 58(17.064,0.982) 59(18.334,2.882) 60(19.604,0.982) 61(20.874,2.882) 62(22.144,0.982) 63(23.414,2.882) 64(24.684,0.982) 65(25.954,2.882) 66(27.224,0.982) 67(28.494,2.882) 68(29.764,0.982) 69(31.034,2.882) 70(32.304,0.982) 71(33.574,2.882) 72(34.844,0.982) 73(41.194,2.882) 74(42.464,0.982) 75(43.734,2.882) 76(45.004,0.982) 77(46.274,2.882) 78(47.544,0.982) 79(48.814,2.882) 80(50.084,0.982) 81(51.354,2.882) 82(52.624,0.982) 83(53.894,2.882) 84(55.164,0.982) 85(56.434,2.882) 86(57.704,0.982) 87(58.974,2.882) 88(60.244,0.982) 89(61.514,2.882) 90(62.784,0.982) 91(64.054,2.882) 92(65.324,0.982) 93(66.594,2.882) 94(67.864,0.982) 95(69.134,2.882) 96(70.404,0.982) 97(71.674,2.882) 98(72.944,0.982) 99(74.214,2.882) 100(75.484,0.982)
  round 4.04 hole 2.54: 101(-0.076,0.032) 102(78.654,0.032)
  silkscreen extent -9.61,-3.97 88.19,4.03, body extent -12.91,-3.4 91.59,3.97, height 20.95
HDR1X2 [mm] "Connector; Header; 2 Position"
  rect 1.5x1.5 hole 0.9: 1(0,0)
  round 1.5 hole 0.9: 2(2.54,0)
  silkscreen extent -1.27,-1.27 3.81,1.27
Ind_RLB0914-470KL [mil]
  rect 56x56 / inner round 60 / far side rect 56x56 hole 36 paste+0 mask+0: 1(-197.83,-0.98)
  round 56 / inner round 60 / far side round 56 hole 36 paste+0 mask+0: 2(0,-0.98)
  silkscreen extent -335,-180 80,178, body extent 15,-1 25,9, height 10
"LEM LTS 25-NP" [mm]
  rrect50% 2.54x1.9 hole 1.3: 1(0,0) 2(0,-2.54) 3(0,-5.08) 4(-12.7,-5.08) 5(-12.7,-2.54) 6(-12.7,0)
  rrect50% 1.3x2.3 hole 0.8: 7(-8.89,7.62) 8(-6.35,7.62) 9(-3.81,7.62)
  silkscreen extent -11.43,-12.7 -1.27,9.53
LT8315 [mm]
  rect 0.8x0.45 smd mask+0.05: 1(-3.104,2.922) 2(-3.104,2.272) 3(-3.104,1.622) 8(-3.104,-1.628) 9(-3.104,-2.278) 10(-3.104,-2.928) 11(2.696,-2.928) 12(2.696,-2.278) 13(2.696,-1.628) 14(2.696,-0.978) 15(2.696,-0.328) 16(2.696,0.322) 17(2.696,0.972) 18(2.696,1.622) 19(2.696,2.272) 20(2.696,2.922)
  rect 1.78x6.3 smd mask+0.05: 21(0.271,-0.013)
  silkscreen extent -3.83,-3.33 2.02,3.27
Male_single_pin#1 [mm]
  round 2 hole 1.25: 1(0,0)
Male_single_pin#2 [mm]
  round 2 hole 1.25: 1(-0.201,0)
Male_single_pin#3 [mm]
  round 2 hole 1.25: 1(-0.136,0)
Male_single_pin#4 [mm]
  round 2 hole 1.25: 1(7.875,0)
Male_single_pin#5 [mm]
  round 2 hole 1.25: 1(-1.48,0)
Male_single_pin#6 [mm]
  round 2 hole 1.25: 1(-14.76,0)
Male_single_pin#7 [mm]
  round 2 hole 1.25: 1(0.76,0)
Male_single_pin#8 [mm]
  round 2 hole 1.25: 1(-0.145,0)
Male_single_pin#9 [mm]
  round 2 hole 1.25: 1(0.165,0)
Male_single_pin#10 [mm]
  round 2 hole 1.25: 1(0.2,0)
Male_single_pin#11 [mm]
  round 2 hole 1.25: 1(0.035,0)
Male_single_pin#12 [mm]
  round 2 hole 1.25: 1(-0.435,-0.015)
Male_single_pin#13 [mm]
  round 2 hole 1.25: 1(-1.225,0.01)
Male_single_pin#14 [mm]
  round 2 hole 1.25: 1(-9.57,-11.14)
Male_single_pin#15 [mm]
  round 2 hole 1.25: 1(-17.19,-20.046)
Male_single_pin#16 [mm]
  round 2 hole 1.25: 1(-4.205,-6.315)
Male_single_pin#17 [mm]
  round 2 hole 1.25: 1(-1.72,-3.765)
Male_single_pin#18 [mm]
  round 2 hole 1.25: 1(9.635,-0.165)
Male_single_pin#19 [mm]
  round 2 hole 1.25: 1(14.35,-5.365)
Male_single_pin#20 [mm]
  round 2 hole 1.25: 1(0.475,0.241)
Male_single_pin#21 [mm]
  round 2 hole 1.25: 1(0,-1.849)
Male_single_pin#22 [mm]
  round 2 hole 1.25: 1(0,-2.934)
Male_single_pin#23 [mm]
  round 2 hole 1.25: 1(0,0.058)
Male_single_pin#24 [mm]
  round 2 hole 1.25: 1(0,0.193)
Male_single_pin#25 [mm]
  round 2 hole 1.25: 1(0,-1.289)
Male_single_pin#26 [mm]
  round 2 hole 1.25: 1(0,-1.724)
Male_single_pin#27 [mm]
  round 2 hole 1.25: 1(0,-4.069)
Male_single_pin#28 [mm]
  round 2 hole 1.25: 1(0,-0.053)
Male_single_pin#29 [mm]
  round 2 hole 1.25: 1(0,-1.254)
Male_single_pin#30 [mm]
  round 2 hole 1.25: 1(0,0.007)
Male_single_pin#31 [mm]
  round 2 hole 1.25: 1(0,0.178)
Male_single_pin#32 [mm]
  round 2 hole 1.25: 1(0,0.213)
Male_single_pin#33 [mm]
  round 2 hole 1.25: 1(0,0.081)
Male_single_pin#34 [mm]
  round 2 hole 1.25: 1(0,-0.754)
Male_single_pin#35 [mm]
  round 2 hole 1.25: 1(0,-1.064)
P8202NLT [mm]
  rect 1.52x1.27 smd: 1(7.106,0) 2(7.106,-1.85) 3(7.106,-3.7) 4(-0.005,-3.7) 5(-0.005,-1.85) 6(-0.005,0)
  rect 3.05x2.54 smd: 7(3.55,-4.465) 8(3.55,0.764)
  silkscreen extent -0.52,-5.16 7.04,1.43
PB0026NLT [mm]
  rect 2.335x1.19 smd: 1(18.08,0) 2(18.08,-2.54) 3(18.08,-5.08) 4(18.08,-7.62) 5(18.08,-10.16) 6(-0.005,-10.16) 7(-0.005,-7.62) 8(-0.005,-5.08) 9(-0.005,-2.54) 10(-0.005,0)
  rect 7.24x4.25 smd: 11(9.037,0.54) 12(9.037,-10.7)
  silkscreen extent -0.65,-11.96 17.72,1.72
PCB3515M1 [mm]
  round 2.5 hole 1.5: 1(0.025,-0.025) 1(3.835,-0.025) 1(8.915,-0.025) 1(13.995,-0.025) 1(19.075,-0.025) 1(24.155,-0.025) 2(0.025,-22.305) 2(3.835,-22.305) 2(8.915,-22.305) 2(13.995,-22.305) 2(19.075,-22.305) 2(24.155,-22.305)
  silkscreen extent -6.85,-27.78 30.78,5.47
PCB5528WC [mm]
  rect 2x2 hole 1 square: 1(0,0) 1(5,0) 1(10,0) 2(0,-40) 2(5,-40) 2(10,-40) 3(15,0) 3(20,0) 3(25,0) 3(30,0) 4(15,-40) 4(20,-40) 4(25,-40) 4(30,-40)
  silkscreen extent -13.5,-48 43.5,8
PS15-195 [mil] "3namotajni transformator"
  round 60 hole 49.21: 1(0,0) 2(78.74,0) 3(157.48,0) 4(357.48,0) 5(436.22,0) 6(514.96,0) 7(514.96,600) 8(436.22,600) 9(357.48,600) 10(157.48,600) 12(0,600)
  silkscreen extent -118,-98 634,695
R2S-1215 [mm]
  rect 1.8x1.2 smd: 1(0,0) 2(0,-2.54) 4(0,-7.62) 5(10.2,-7.62) 8(10.2,0)
  silkscreen extent -0.14,-10.15 8.98,2.63
R12P22005D [mm]
  rect 1x1 hole 0.5 square: 1(0,0) 2(2.54,0) 5(10.16,0) 6(12.7,0) 7(15.24,0)
  silkscreen extent -1.9,-7.32 17.8,2.54
R0603 [mm]
  rect 1.3x1.2 smd: 1(0,0) 2(1.7,0)
  silkscreen extent -0.8,-0.75 2.5,0.75
R0805 [mm]
  rect 1.6x1.6 smd: 1(0,0) 2(2.2,0)
  silkscreen extent -1,-1 3.2,1
RogovskiVNpravi [mm]
  round 1.4 hole 0.8: 1(4.5,2) 2(4.5,-2)
  round 1.8 hole 1: Rg1(0,0) Rg2(9,0)
SDE0403A-100M [mm]
  rect 1.8x4.5 smd: 1(0,0) 2(3.3,0)
  silkscreen extent -1.25,-2.58 4.52,2.6
SO8 [mm]
  rect 1.5x0.8 smd: 1(0,0) 2(0,-1.27) 3(0,-2.54) 4(0,-3.81) 5(5,-3.81) 6(5,-2.54) 7(5,-1.27) 8(5,0)
  silkscreen extent -1.16,-4.52 6.07,1.36
SO14 [mm]
  rect 1.4x0.5 smd: 1(0,0) 2(0,-1.27) 3(0,-2.54) 4(0,-3.81) 5(0,-5.08) 6(0,-6.35) 7(0,-7.62) 8(5.4,-7.62) 9(5.4,-6.35) 10(5.4,-5.08) 11(5.4,-3.81) 12(5.4,-2.54) 13(5.4,-1.27) 14(5.4,0)
  silkscreen extent -1,-8.2 6.4,1
"SOD-123F Central S" [mm]
  rect 0.9x1.2 smd: 1(1.7,0) 2(-1.7,0)
  silkscreen extent -2.45,-1.05 2.52,1.07
"SOIC RW-16" [mm]
  rect 2.299x0.6 smd: 1(-0.003,-0.005) 2(-0.003,-1.275) 3(-0.003,-2.545) 4(-0.003,-3.815) 5(-0.003,-5.085) 6(-0.003,-6.355) 7(-0.003,-7.625) 8(-0.003,-8.895) 9(9.053,-8.895) 10(9.053,-7.625) 11(9.053,-6.355) 12(9.053,-5.085) 13(9.053,-3.815) 14(9.053,-2.545) 15(9.053,-1.275) 16(9.053,-0.005)
  silkscreen extent -1.53,-9.73 10.58,1.78
"THL 10WI" [mm]
  round 1.75 hole 1.25: 1(0,0) 2(0,5.08) 3(20.32,-7.62) 4(20.32,2.54) 5(20.32,12.7) 6(0,12.7)
  silkscreen extent -3,-10.62 23.32,15.7
TO-247AC [mm]
  rect 7.62x3.81 hole 1.7: A1(-0.01,-0.003)
  oval 7.62x3.81 hole 1.7: A2(-0.01,-10.923) K(-0.01,-5.463)
  silkscreen extent -2.52,-13.47 4.03,2.52
"TO-247AD-V SMD" [mm]
  oval 4x10 smd: D(5.5,2.5) S(11,2.5)
  rect 4x10 smd: G(0,2.5)
  silkscreen extent -2.7,-2.75 13.75,2.64
"TRN 3SM" [mm]
  rect 0.75x1.75 smd: 1(0,0) 2(2,0) 3(4.8,0) 4(6.8,0) 5(8.8,0)
  rect 1.75x1.75 smd: 6(1,-10.78) 7(7.8,-10.78)
  silkscreen extent -1.55,-11.89 10.35,1.1
UCC27211AQDDARQ1 [mm]
  rect 2.15x0.45 smd: 1(0,0) 2(0,-1.27) 3(0,-2.54) 4(0,-3.81) 5(5.75,-3.81) 6(5.75,-2.54) 7(5.75,-1.27) 8(5.75,0)
  rect 2.4x3.1 smd: termal(2.875,-1.905)
  silkscreen extent 1.35,-4.45 4.42,0.63
UPW2A151MHD [mm]
  rect 1x1 hole 0.6: 1(0,0)
  round 1 hole 0.6: 2(5,0)
  silkscreen extent -3.83,-6.34 8.83,6.32

## Part data
C1_1: library part B32673P6474K000, "0.47uF 630VDC"
C1_2 C1_3 C1_4: library part B32652A2332J000, "3.3n 2000VDC"
C1_5 C1_10 C2_5 C2_6 C2_9 C2_10: library part 08051A750JAT2A, "CAP CER 3.3nF 50V"
C1_6 C1_7 C1_8 C1_9 C1_11 C1_12 C1_13 C1_14 C2_3 C2_7: library part 08051A750JAT2A, "CAP CER 1uF 50V"
C2_1: library part B32523Q1475K000, "4.7uF 100VDC"
C2_2: library part "AVX SM03 1A 105K AN 360"
C2_4 C2_8: library part 08051A750JAT2A, "CAP CER 0.1uF 100V"
C2_11 C5_1 C6_1 C6_3 C6_4 C7_1 C10_1 C11_1 C13_2: library part 08051A750JAT2A, "CAP CER 0.1uF 100V X7R 0805"
C3_4 C3_5: library part 12061C225K4Z2A, "CAP 2.2uF MLCC SMD 100VDC"
C3_6 C3_7 C3_8 C3_9: library part 12061C225K4Z2A, "CAP 4.7uF MLCC SMD 50VDC"
C4_1 C4_2: library part 12061C225K4Z2A, "CAP 10uF MLCC SMD 50VDC"
C4_3: library part 08051A750JAT2A, "CAP CER 22nF 100V X7R 0805"
C4_4: library part C1206C681KGRACAUTO, "CAP 0.33uF"
C4_5 C4_8: library part 08051A750JAT2A, "CAP CER 47pF  0805"
C4_6: library part C3225X7T2J104M160AC, "CAP CER 0.1UF 630V X7T 1210"
C4_7: "CAP ALUM 150UF 20% 100V RADIAL"
C6_2: library part 08051A750JAT2A, "CAP CER 100pF 100V 0805"
C8_1: library part 08051A750JAT2A, "CAP CER 75PF 100V C0G/NP0 0805"
C13_1: library part 08051A750JAT2A, "CAP CER 3.3nF 50V C0G/NP0 0805"
CGND: library part 08051A750JAT2A, "CAP CER ? 0805"
D2_1 D2_2 D2_3 D2_4: library part 63CPQ100PBF
D4_1: "Diode Standard 400V 1A Surface Mount SOD-123F"
D4_5: "Diode Standard 800V 1A Surface Mount SOD-123F"
J5 J6 J25 J26 J27 J30 J31 J32 J33 J34 J35 J36 J37 J38 J39 J40 J41 J42 J43 J44 J45 JA0 JA1 JA2 JA3 JA4 JA5 JA6 JA7 JG0 JG1 JG2 JG3 JG4 JG5 JG6 JG7 JG10 JG12 JG13 JG14 JG15 JG16 JG17 JG18 JG20 JG24 JG25 JG26 JG27 JG30 JG32 JG48 JG84 JG86: library part Male_single_pin
L1_1 L2_1: library part Ind_PCB3515M1
L3_4 L3_5: library part SDE0403A-100M, "Fixed Inductors 10uH 20% SMD 0403 AEC-Q200"
L3_6 L3_7 L3_8 L3_9: library part Ind_RLB0914-470KL, "FIXED IND 47UH 1.5A 140 MOHM TH 912-220KL"
P6_1: "Header, 2-Pin"
Q1_1 Q1_2 Q1_3 Q1_4: "SiC 70A 650V"
Q2_1 Q2_2 Q2_3 Q2_4: library part IPB017N10N5ATMA1
R1_1 R1_2 R1_3 R1_4 R1_6 R1_7 R1_8 R1_9 R2_5 R2_6 R2_7 R2_8 R2_9 R2_11 R5_4 R6_7 R7_7 R10_7 R11_7 R13_3 R13_6: library part "R0805 100", "R0805 100"
R1_5 R1_10 R7_8 R10_8 R10_10 R11_8 R13_4 R13_5 R13_7 R13_9 R13_10: library part "R0805 11K", "R0805 11K"
R2_1 R2_2 R2_3 R2_4: library part "R0805 100", "R0805 10"
R2_10: library part "R0805 100", "R0805 1.2k"
R3_1 R3_2 R3_3 R3_4 R3_5 R3_6 R3_7 R3_8 R3_9 R4_10 R10_12 R10_13 R11_12 R11_13 R13_12: library part "R0805 100", "R0805 0"
R4_1: library part "R0805 110K", "R0805 110K"
R4_2 R4_3: library part RC0805FR-0788K7L, "RES SMD 120k 0805"
R4_4: library part "R0805 110K", "R0805 0.267"
R4_5: library part "R0805 200K", "R0805 20K"
R4_6: library part "R0805 330", "R0805 200"
R4_7 R4_11 R4_12: library part RC0805FR-07324KL, "RES SMD 324K OHM 1% 1/8W 080"
R4_8: library part "R0805 100", "R0805 5.1k"
R4_9: library part RC0805FR-07191KL, "Thick Film Resistors - SMD 191K OHM 1%"
R5_1 R5_2: library part "R0805 100", "R0805 10k"
R5_3: library part "R0805 11K", "R0805 1.2k"
R6_1 R6_2 R6_3 R6_4: library part ERA-3AEB154V, "RES SMD 150K OHM 0.1% 1/10W 0603"
R6_5 R6_6: library part ERA-6AEB122V, "RES SMD 1.2K OHM 0.1% 1/8W 0805"
R7_1 R7_2 R7_10 R8_2 R10_2 R10_3 R10_4 R11_2 R11_3 R11_4 R13_1 R13_2 R13_11: library part "R0805 330", "R0805 330"
R7_3 R8_1: library part "R0805 11K", "R0805 10K"
R7_4 R8_3: library part "R0805 11K", "R0805 10k"
R7_5 R7_6 R8_4: library part "R0805 330", "R0805 10"
R7_9 R10_9 R11_9 R13_8: library part "R0805 11K", "R0805 2.2k"
R9_1 R12_2: library part "R0805 330", "R0805 2.2k"
R10_11 R11_10: library part "R0805 11K", "R0805 16.2k"
R11_11: library part "R0805 11K", "R0805 11k"
R12_1 R12_3: library part "R0805 330", "R0805 4.7k"
RGND: library part "R0805 100", "R0805 ?"
RP10_1 RP10_2 RP11_1 RP11_2: library part "R0805 11K", "R0805 0"
SC_ROG: "LED RED 0805"
U1_1 U1_2: "4-A, 6-A, 5.7-kVRMS Isolated Dual-Channel Gate Driver with Enable"
U2_1: library part "LEM LTS 25-NP", "SENSOR CURRENT HALL 25A AC/DC"
U2_2 U2_3: library part UCC27211AQ, "IC DVR HIGH/LOW SIDE 4A 8SO"
U3_1: "DC/DC 12V 10W"
U3_2 U3_3: "DC/DC Isolated 12V IN 5V OUT"
U3_4 U3_5: "Isolated DC/DC Converters 2W DC/DC 1kV UNREG 12Vin 15Vout"
U3_6 U3_7 U3_8 U3_9: "Isolated DC/DC Converters 2W 12Vin +20/-5Vout 50/-200mA"
U4_1: "LT8315 Isolated Flyback Converter"
U6_1: "Optically Isolated Amplifiers Precision Iso-Amp"
U7_1 U10_1 U11_1 U13_1: "Dual Differential Comparator"
U12_1: "DIMM100 5390213-1"

## Free pads (board coordinates)
  rect 86.61x110.24 smd far side: 1(10562.99,5020.67) 1(11085.63,5017.72) 2(10738.19,5020.67) 2(10910.43,5017.72)
  rect 250x300 smd: 2(2368.11,5136.81) 2(2368.11,5936.02) 2(2368.11,6343.5) 2(2377.95,5500.98) 2(11402.56,5778.54) 2(11408.46,5377.95)
  round 196.85 hole 137.8: 3(2288.39,3714.57) 3(2342.52,7185.04) 3(7190.94,7190.94) 3(11433.07,3732.28)
  rect 393.7x1181.1 smd: 4(4283.46,6549.21) 4(4997.05,6555.12)
  rect 984.25x393.7 smd: 4(5822.83,5100.39) 4(5822.83,6674.21) 4(6911.42,5100.39) 4(6911.42,6671.26)
  rect 1181.1x393.7 smd: 4(8332.68,6175.2) 4(8332.68,6972.44)
  round 30 smd far side: 6(2298.82,6113.19) 6(2397.64,5798.23) 6(2449.8,5516.73) 6(2568.9,6221.46) 6(3057.09,6427.17) 6(3117.6,5833.05) 6(3167.6,5833.05) 6(3217.6,5833.05) 6(3217.6,6189.55) 6(3219.49,5999.02) 6(3239.17,5628.94) 6(3558.07,6912.4) 6(3650.59,6426.18) 6(3664.06,5832.26) 6(3666.34,6549.21) 6(3666.34,6596.46) 6(3709.65,6658.46) 6(3714.06,5832.26) 6(3764.06,5832.26) 6(3813.98,6037.4) 6(3814.06,5832.26) 6(3935.04,5991.14) 6(3938.98,6063.98) 6(4558.07,6153.54) 6(4562.99,5990.16) 6(4567.91,6304.13) 6(4567.91,6483.27) 6(5539.37,5737.2) 6(5543.31,6360.63) 6(5570.87,6619.09) 6(6091.54,6641.73) 6(6355.31,6129.92) 6(6437.01,5586.42) 6(6437.01,5586.42) 6(6437.01,5636.42) 6(6437.01,5736.42) 6(6437.01,5786.42) 6(6643.7,6139.37) 6(6643.7,6189.37) 6(6643.7,6239.37) 6(6643.7,6289.37) 6(6643.7,6339.37) 6(6643.7,6389.37) 6(6643.7,6439.37) 6(6643.7,6489.37) 6(6649.61,5586.42) 6(6649.61,5736.42) 6(6900.59,5886.81) 6(6944.88,5532.48) 6(6944.88,5582.48) 6(7017.72,6189.37) 6(7017.72,6239.37) 6(7017.72,6389.37) 6(7017.72,6439.37) 6(7157.48,5582.48) 6(7157.48,5632.48) 6(7282.48,5900.59) 6(7421.46,6249.02) 6(7471.46,6248.03) 6(7521.85,6330.71) 6(7571.85,6330.71) 6(8000,5975.39) 6(9722.44,5981.3) 6(9790.35,6082.68) 6(9909.45,5968.5) 6(10238.19,5973.43) 6(10309.06,6076.77) 6(10432.83,5973.35) 6(11353.35,5965.55) 7(2437.01,4875) 7(2487.2,5284.45) 7(2584.65,5087.6) 7(2828.74,5088.58) 7(10171.26,4625) 8(2593.5,4345.47) 8(2948.82,4208.66) 12(8636.81,5106.3) 12(8636.81,5146.65) 12(8636.81,5194.88) 12(8637.8,5239.17) 12(9295.28,4771.65) 12(9386.81,5106.3) 12(9386.81,5194.88) 12(9386.81,5239.17) 12(9387.8,5146.65) 12(9756.89,5239.17) 12(9930.12,5550.2) 14(8183.07,3785.43)
  round 30 on Mid4: 6(2298.82,6113.19) 6(2397.64,5798.23) 6(2449.8,5516.73) 6(2568.9,6221.46) 6(3117.6,5833.05) 6(3167.6,5833.05) 6(3217.6,5833.05) 6(3217.6,6189.55) 6(3219.49,5999.02) 6(3239.17,5628.94) 6(3463.98,6188.84) 6(3650.59,6426.18) 6(3664.06,5832.26) 6(3666.34,6549.21) 6(3666.34,6596.46) 6(3709.65,6658.46) 6(3714.06,5832.26) 6(3764.06,5832.26) 6(3813.98,6037.4) 6(3813.98,6188.68) 6(3814.06,5832.26) 6(3935.04,5991.14) 6(3938.98,6063.98) 6(4558.07,6153.54) 6(4562.99,5990.16) 6(4567.91,6304.13) 6(4567.91,6483.27) 6(5543.31,6360.63) 6(5730.31,6470.47) 6(6437.01,5636.42) 6(6437.01,5786.42) 6(6643.7,6139.37) 6(6643.7,6289.37) 6(6643.7,6339.37) 6(6643.7,6489.37) 6(6900.59,5886.81) 6(6944.88,5532.48) 6(6944.88,5582.48) 6(7157.48,5582.48) 6(7157.48,5632.48) 6(7282.48,5900.59) 6(8000,5975.39) 6(9722.44,5981.3) 6(9790.35,6082.68) 6(9909.06,5968.5) 6(10238.19,5973.43) 6(10309.06,6076.77) 6(10432.83,5973.35) 6(11353.35,5965.55) 7(2437.01,4875) 7(2487.2,5284.45) 7(2828.74,5088.58) 7(10171.26,4625) 8(2593.5,4345.47) 8(2948.82,4208.66) 12(8636.81,5106.3) 12(8636.81,5146.65) 12(8636.81,5194.88) 12(8637.8,5239.17) 12(9386.81,5106.3) 12(9386.81,5194.88) 12(9386.81,5239.17) 12(9387.8,5146.65) 12(9756.89,5239.17) 12(9930.12,5550.2) 14(8183.07,3785.43)
  round 60 smd far side: 6(2480.32,4531.5)
  round 60 on Mid1: 6(2480.32,4531.5)
  round 35 smd far side: 6(2592.52,6959.65) 6(5394.69,5351.38) 6(5546.26,5457.48) 6(5956.69,5562.01) 6(6010.83,5905.51) 6(6142.72,5976.38)
  round 35 on Mid4: 6(2592.52,6959.65) 6(5394.69,5351.38) 6(5546.26,5457.48) 6(5956.69,5562.01) 6(6010.83,5905.51) 6(6142.72,5976.38)
  round 30 on Mid2: 6(3057.09,6427.17) 6(6437.01,5736.42) 6(6643.7,6189.37) 6(6643.7,6239.37) 6(6643.7,6389.37) 6(6643.7,6439.37) 6(6649.61,5586.42) 6(6649.61,5736.42) 6(7017.72,6189.37) 6(7017.72,6239.37) 6(7017.72,6389.37) 6(7017.72,6439.37) 6(7421.46,6249.02) 6(7471.46,6248.03) 6(7521.85,6330.71) 6(7571.85,6330.71) 7(2584.65,5087.6)
  round 110 smd: 6(3110.24,6103.35) 6(3703.74,6100.39) 15(3102.36,5467.52) 15(3702.76,5471.46) 15(4136.81,5305.12) 15(4665.35,5314.96)
  round 110 on Mid2: 6(3110.24,6103.35) 15(3102.36,5467.52)
  round 25 smd far side: 6(3464.06,6188.76) 6(3648.62,5626.97) 6(3699.8,4803.15) 6(3813.98,6188.68) 6(4000.98,4746.65) 6(4475.39,4820.87) 6(5730.31,6470.47)
  round 30 on Mid1: 6(3558.07,6912.4) 6(5539.37,5737.2) 6(5570.87,6619.09) 6(6355.31,6129.92) 12(9295.28,4771.65)
  round 25 on Mid4: 6(3648.62,5626.48) 6(3699.8,4803.15) 6(4000.98,4746.65) 6(4475.39,4820.87)
  round 110 on Mid1: 6(3703.74,6100.39) 15(3702.76,5471.46) 15(4136.81,5305.12) 15(4665.35,5314.96)
  round 50 smd far side: 6(3710.63,5038.39) 7(2574.8,4428.15) 12(10553.15,4837.6)
  round 50 on Mid2: 6(3710.63,5038.39) 12(10553.15,4837.6)
  round 25 on Mid3: 6(6091.54,6641.73)
  round 45 smd far side: 6(6349.41,6453.74) 6(7645.67,5977.36) 6(9082.68,6353.35) 7(2887.8,4336.61) 7(4362.2,4107.28)
  round 45 on Mid4: 6(6349.41,6453.74) 6(7645.67,5977.36) 6(9082.68,6353.35) 7(2887.8,4336.61)
  round 55 smd: 6(9269.69,6871.06) 6(9269.69,6947.83) 6(9269.69,7024.61) 6(9269.69,7098.43) 6(9269.69,7175.2) 6(9334.65,6871.06) 6(9334.65,6947.83) 6(9334.65,7024.61) 6(9334.65,7098.43) 6(9334.65,7175.2) 6(10585.63,6967.52) 6(10585.63,7056.1) 6(10585.63,7146.65) 6(10696.85,6967.52) 6(10696.85,7056.1) 6(10696.85,7146.65) 6(10807.09,6967.52) 6(10807.09,7056.1) 6(10807.09,7146.65)
  round 52 on Mid1: 6(9269.69,6871.06) 6(9269.69,6947.83) 6(9269.69,7024.61) 6(9269.69,7098.43) 6(9269.69,7175.2) 6(9334.65,6871.06) 6(9334.65,6947.83) 6(9334.65,7024.61) 6(9334.65,7098.43) 6(9334.65,7175.2)
  round 55 on Mid2: 6(10585.63,6967.52) 6(10585.63,7056.1) 6(10585.63,7146.65) 6(10696.85,6967.52) 6(10696.85,7056.1) 6(10696.85,7146.65) 6(10807.09,6967.52) 6(10807.09,7056.1) 6(10807.09,7146.65)
  round 50 on Mid4: 7(2574.8,4428.15) 12(9672.05,4767.72) 12(10242.91,4773.62)
  round 45 on Mid2: 7(4362.2,4107.28)
  round 50 smd: 12(9672.05,4767.72) 12(10242.91,4773.62)
  round 130 smd: 13(8429.13,5300.2) 13(8867.13,5291.34)
  round 130 on Mid1: 13(8429.13,5300.2)
  round 130 on Mid2: 13(8867.13,5291.34)

## Via types
v1: diameter 30, hole 20, Signal Layer 4 to Bottom Layer, 76 vias
v2: diameter 30, hole 20, Top Layer to Bottom Layer, 35 vias
v3: diameter 30, hole 20, Signal Layer 2 to Bottom Layer, 18 vias
v4: diameter 30, hole 20, Signal Layer 1 to Signal Layer 2, 12 vias
v5: diameter 50, hole 28, Top Layer to Bottom Layer, 12 vias
v6: diameter 50, hole 28, Top Layer to Signal Layer 1, 10 vias
v7: diameter 50, hole 28, Top Layer to Signal Layer 2, 9 vias
v8: diameter 40, hole 20, Signal Layer 4 to Bottom Layer, 5 vias
v9: diameter 40, hole 20, Top Layer to Bottom Layer, 5 vias
v10: diameter 30, hole 20, Signal Layer 1 to Bottom Layer, 5 vias
v11: diameter 100, hole 50, Top Layer to Signal Layer 1, 4 vias
v12: diameter 40, hole 20, Signal Layer 2 to Bottom Layer, 3 vias
v13: diameter 40, hole 20, Top Layer to Signal Layer 4, 2 vias
v14: diameter 100, hole 50, Top Layer to Signal Layer 2, 2 vias
v15: diameter 30, hole 20, Signal Layer 3 to Bottom Layer, 1 vias
v16: diameter 120, hole 60, Top Layer to Signal Layer 2, 1 vias
v17: diameter 120, hole 60, Top Layer to Signal Layer 1, 1 vias
v18: diameter 50, hole 28, Signal Layer 1 to Bottom Layer, 1 vias

## Nets (pads, with @x,y where several pads share a name; then routed paths per layer and width w, separated by ;. In a path a pad name is that pad's centre, name@x,y a point inside that pad or via, vN(x,y) a via of type N, cw(c..) or ccw(c..) an arc to the next point about the centre after c; other vN are vias at no path point)
3V3: pad.14 R12_1.1 R12_3.1 U12_1.1 | length 3543.6
  Signal Layer 4 w10: U12_1.1@4952.51,3778.82 4952.51,3673.47 4987.2,3638.78 8096.46,3638.78 8183.07,3725.39 v1(8183.07,3785.43)
  Bottom Layer w10: R12_1.1@8185.04,3786.42 R12_3.1@8185.04,3883.86
"3V3 ISO": U12_1.51
"+5V NN": C1_5.2 C1_10.2 C6_1.2 J42.1 pad.6@2397.64,5798.23 pad.6@2592.52,6959.65 pad.6@3117.6,5833.05 pad.6@3714.06,5832.26 pad.6@6142.72,5976.38 pad.6@7645.67,5977.36 pad.6@8000,5975.39 pad.7@2437.01,4875 pad.7@10171.26,4625 R7_2.2 R7_3.2 R8_1.2 R9_1.1 R10_13.1 R11_13.1 R13_1.2 U1_1.3 U1_1.8 U1_2.3 U1_2.8 U2_1.9 U3_2.3 U6_1.8 U9_1.14 U9_2.20 U9_3.14 U9_4.14 U12_1.77 U12_1.82 U12_1.87 U12_1.92 U12_1.96 U13_2.14 | length 31306.4
  Top Layer w40: R7_2.2@4347.44,4780.51 4360.24,4793.31 R7_3.2@4442.91,4793.31 4442.91,4701.77 4526.57,4618.11 8728.35,4618.11 8795.28,4551.18 9001.97,4551.18 J42.1@9123.03,4430.12
  Signal Layer 2 w10: U12_1.82@6902.51,3853.62 6942.2,3853.62 7002.95,3914.37 7002.95,3947.83 7038.39,3983.27 ; U12_1.92@7402.51,3853.62 7443.19,3853.62 7505.91,3916.34 7505.91,3955.71 7533.46,3983.27 ; U12_1.96@7602.51,3853.62 7639.05,3853.62 7702.76,3917.32 7702.76,3947.83 7738.19,3983.27
  Signal Layer 2 w20: U12_1.77@6652.51,3928.42 6707.36,3983.27 7038.39,3983.27 7207.36,3983.27 ; U12_1.87@7152.51,3928.42 7207.36,3983.27 ; J42.1@9123.03,4430.12 8779.53,4430.12 8332.68,3983.27 7738.19,3983.27 7533.46,3983.27 7207.36,3983.27
  Signal Layer 4 w20: v1(2437.01,4875) 2374.02,4937.99 2374.02,5774.61 v1(2397.64,5798.23) 3082.78,5798.23 v1(3117.6,5833.05) 3117.6,5991.61 3175.2,6049.21 3175.2,6363.19 3454.72,6642.72 3454.72,6729.33 ; v1(3714.06,5832.26) 3962.66,5583.66 4178.15,5583.66 4448.82,5854.33 ; v1(10171.26,4625) 10437.99,4625 11013.78,5200.79 11013.78,6339.37 U2_1.9@11118.5,6444.09
  Signal Layer 4 w40: v1(2592.52,6959.65) 3224.41,6959.65 3454.72,6729.33 4211.61,6729.33 4240.47,6700.47 4288.39,6652.56 4288.39,5942.91 4376.97,5854.33 4448.82,5854.33 5263.78,5854.33 5386.81,5977.36 v8(7645.67,5977.36) 8160.43,5977.36 8291.34,5846.46 8291.34,5261.81 J42.1@9123.03,4430.12
  Bottom Layer w20: C6_1.2@2388.78,6960.63 2388.98,6960.83 U6_1.8@2500,6960.83 ; v1(2397.64,5798.23) 2397.64,5871.06 R13_1.2@2399.61,5873.03 ; U1_1.8@2867.6,5833.05 2867.6,5885.31 2888.78,5906.5 3099.41,5906.5 3117.6,5888.31 v1(3117.6,5833.05) 3117.6,5793.78 3058.07,5734.25 C1_5.2@3058.07,5711.61 ; U1_2.8@3464.06,5832.26 3464.06,5885.31 3488.19,5909.45 3678.15,5909.45 3714.06,5873.54 v1(3714.06,5832.26) 3714.06,5787.87 3657.48,5731.3 C1_10.2@3657.48,5717.52 ; U9_2.20@6643.7,6539.37 6741.14,6539.37 ; U9_4.14@6649.61,5536.42 6826.77,5536.42 6869.09,5494.09 6897.64,5494.09 ; 6697.83,5294.29 6897.64,5494.09 ; R9_1.1@6731.3,5943.9 6731.3,6529.53 6741.14,6539.37 ; U9_3.14@7157.48,5532.48 7110.24,5532.48 7071.85,5494.09 6897.64,5494.09 ; v1(8000,5975.39) 8000,6115.16 U9_1.14@7571.85,6543.31 7571.85,6572.83 7536.42,6608.27 6810.04,6608.27 6741.14,6539.37 ; U3_2.3@9976.38,4771.65 10123.03,4625 v1(10171.26,4625)
  Bottom Layer w40: U6_1.8@2500,6960.83 2501.18,6959.65 v1(2592.52,6959.65) ; R10_13.1@5987.2,6001.97 6117.13,6001.97 v1(6142.72,5976.38) ; R11_13.1@6000.98,5294.29 6697.83,5294.29 7503.94,5294.29 7645.67,5436.02 v8(7645.67,5977.36) ; R8_1.2@8933.07,4640.75 8933.07,4620.08 J42.1@9123.03,4430.12 9223.43,4430.12 9433.07,4639.76 9891.73,4639.76 9976.38,4724.41 U3_2.3@9976.38,4771.65 U3_2.3@9976.38,4772.64
"+5V VN": C6_3.2 J43.1 U3_3.3 U6_1.1 | length 8783.5
  Bottom Layer w20: C6_3.2@3116.14,6904.53 3116.14,6904.72 3172.24,6960.83
  Bottom Layer w40: U6_1.1@2921.26,6960.83 3172.24,6960.83 3352.17,6960.83 3485.24,6827.76 4001.97,6827.76 4085.51,6911.3 7856.42,6911.3 7924.21,6843.5 8606.3,6843.5 9005.91,6443.9 9005.91,4702.76 J43.1@9125,4583.66 9300.2,4583.66 9452.76,4736.22 U3_3.3@9452.76,4771.65